# Altium PCB PicoDaisy.PcbDoc
Units mm, origin at the board's own origin, x right, y up, seen from the top; angles counter-clockwise.
Board outline 94.29 x 90.68 mm, 4 copper layers (Top Layer, Layer 1, Layer 2, Bottom Layer), stack 0.603 mm thick; 134 components, 71 nets, 387 pads, 102 vias.
Unrouted connection lines stored in the file: 47.
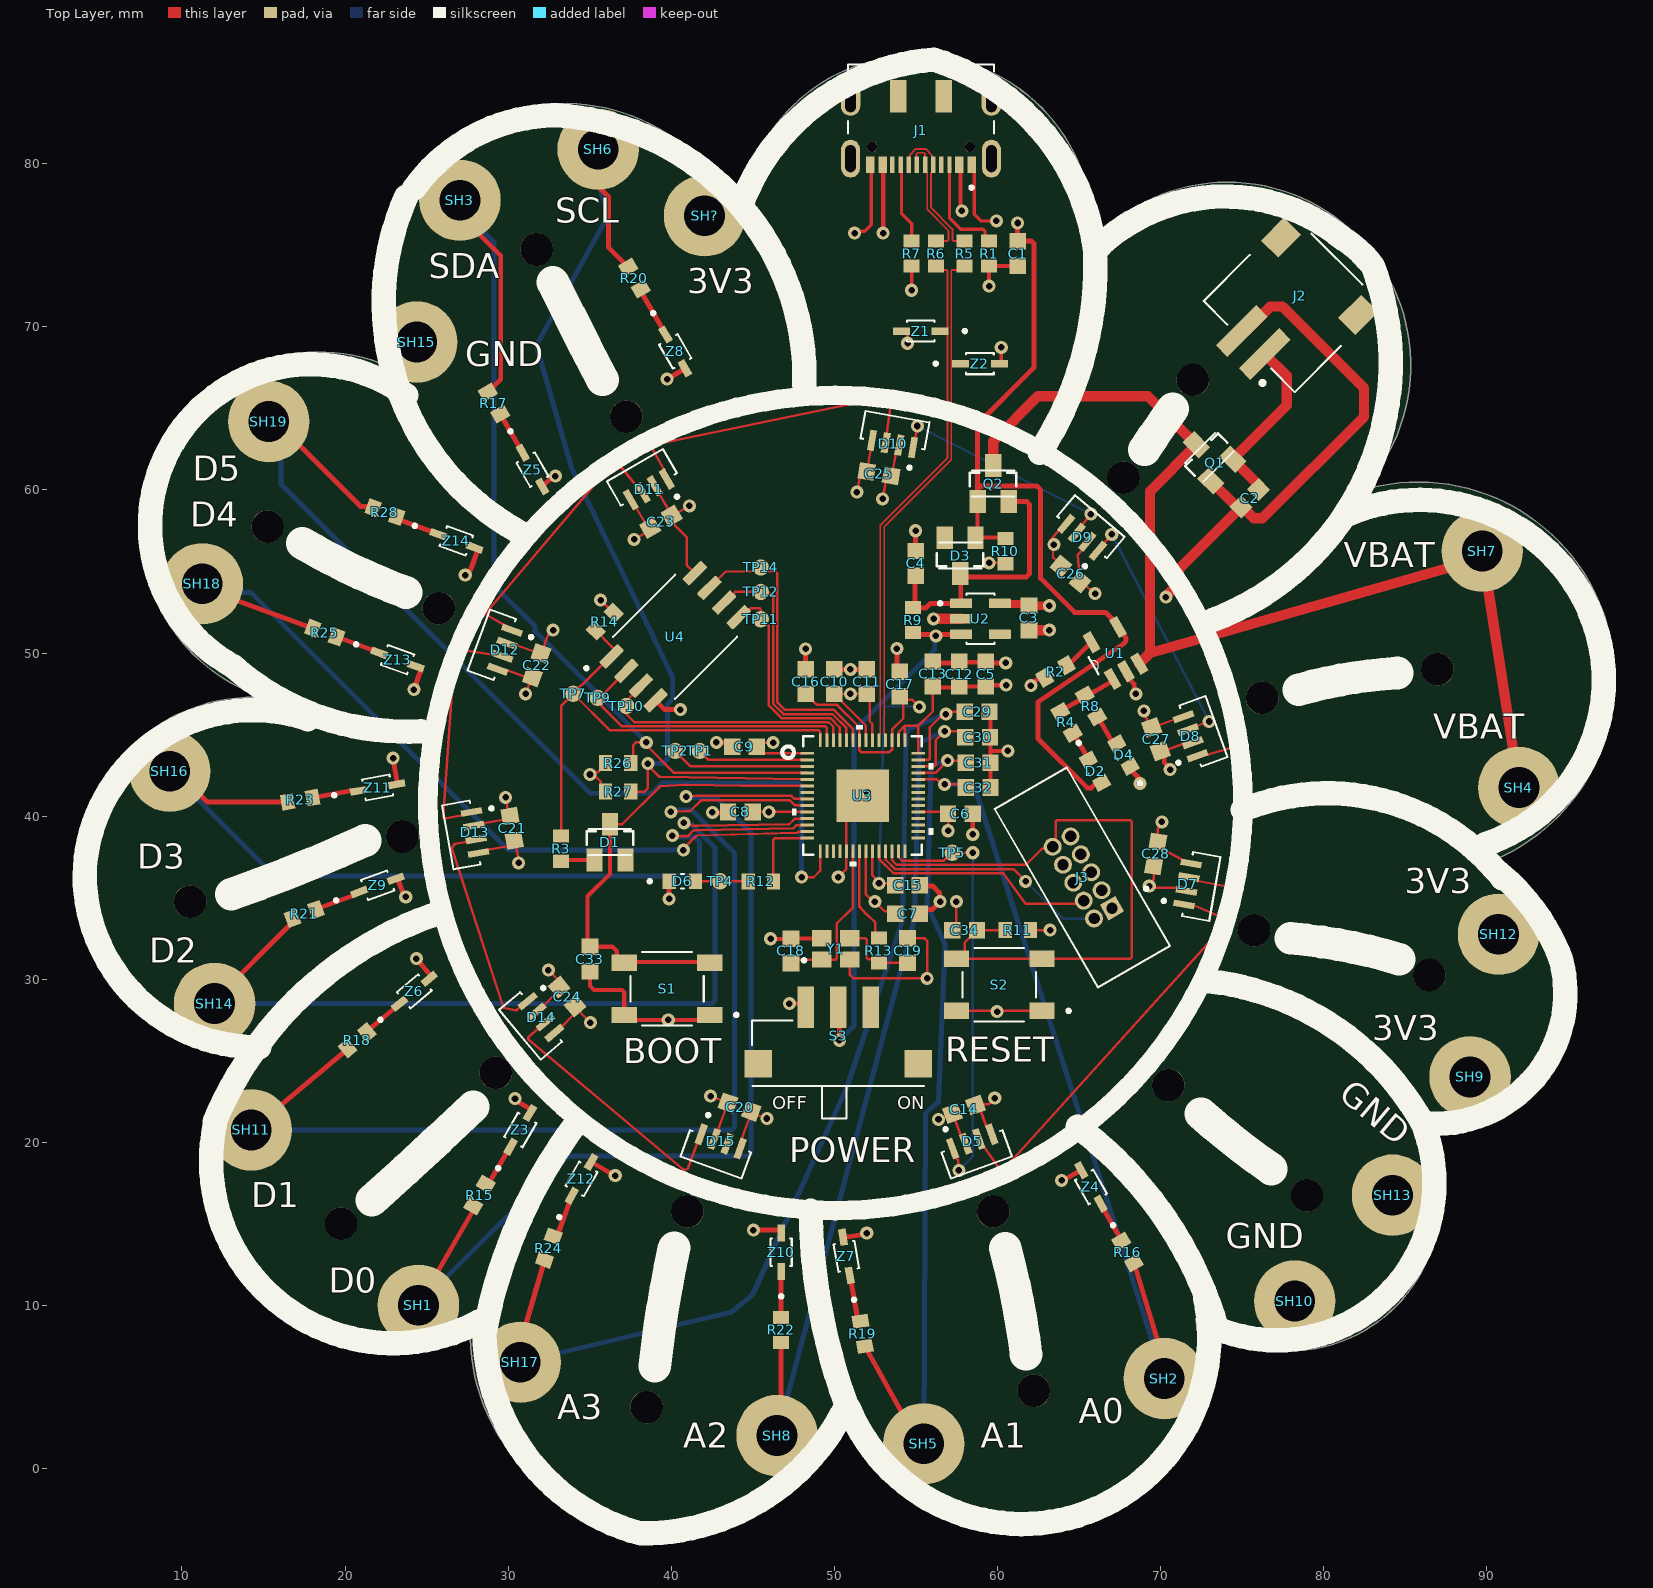
[diagram p0: Top Layer view]
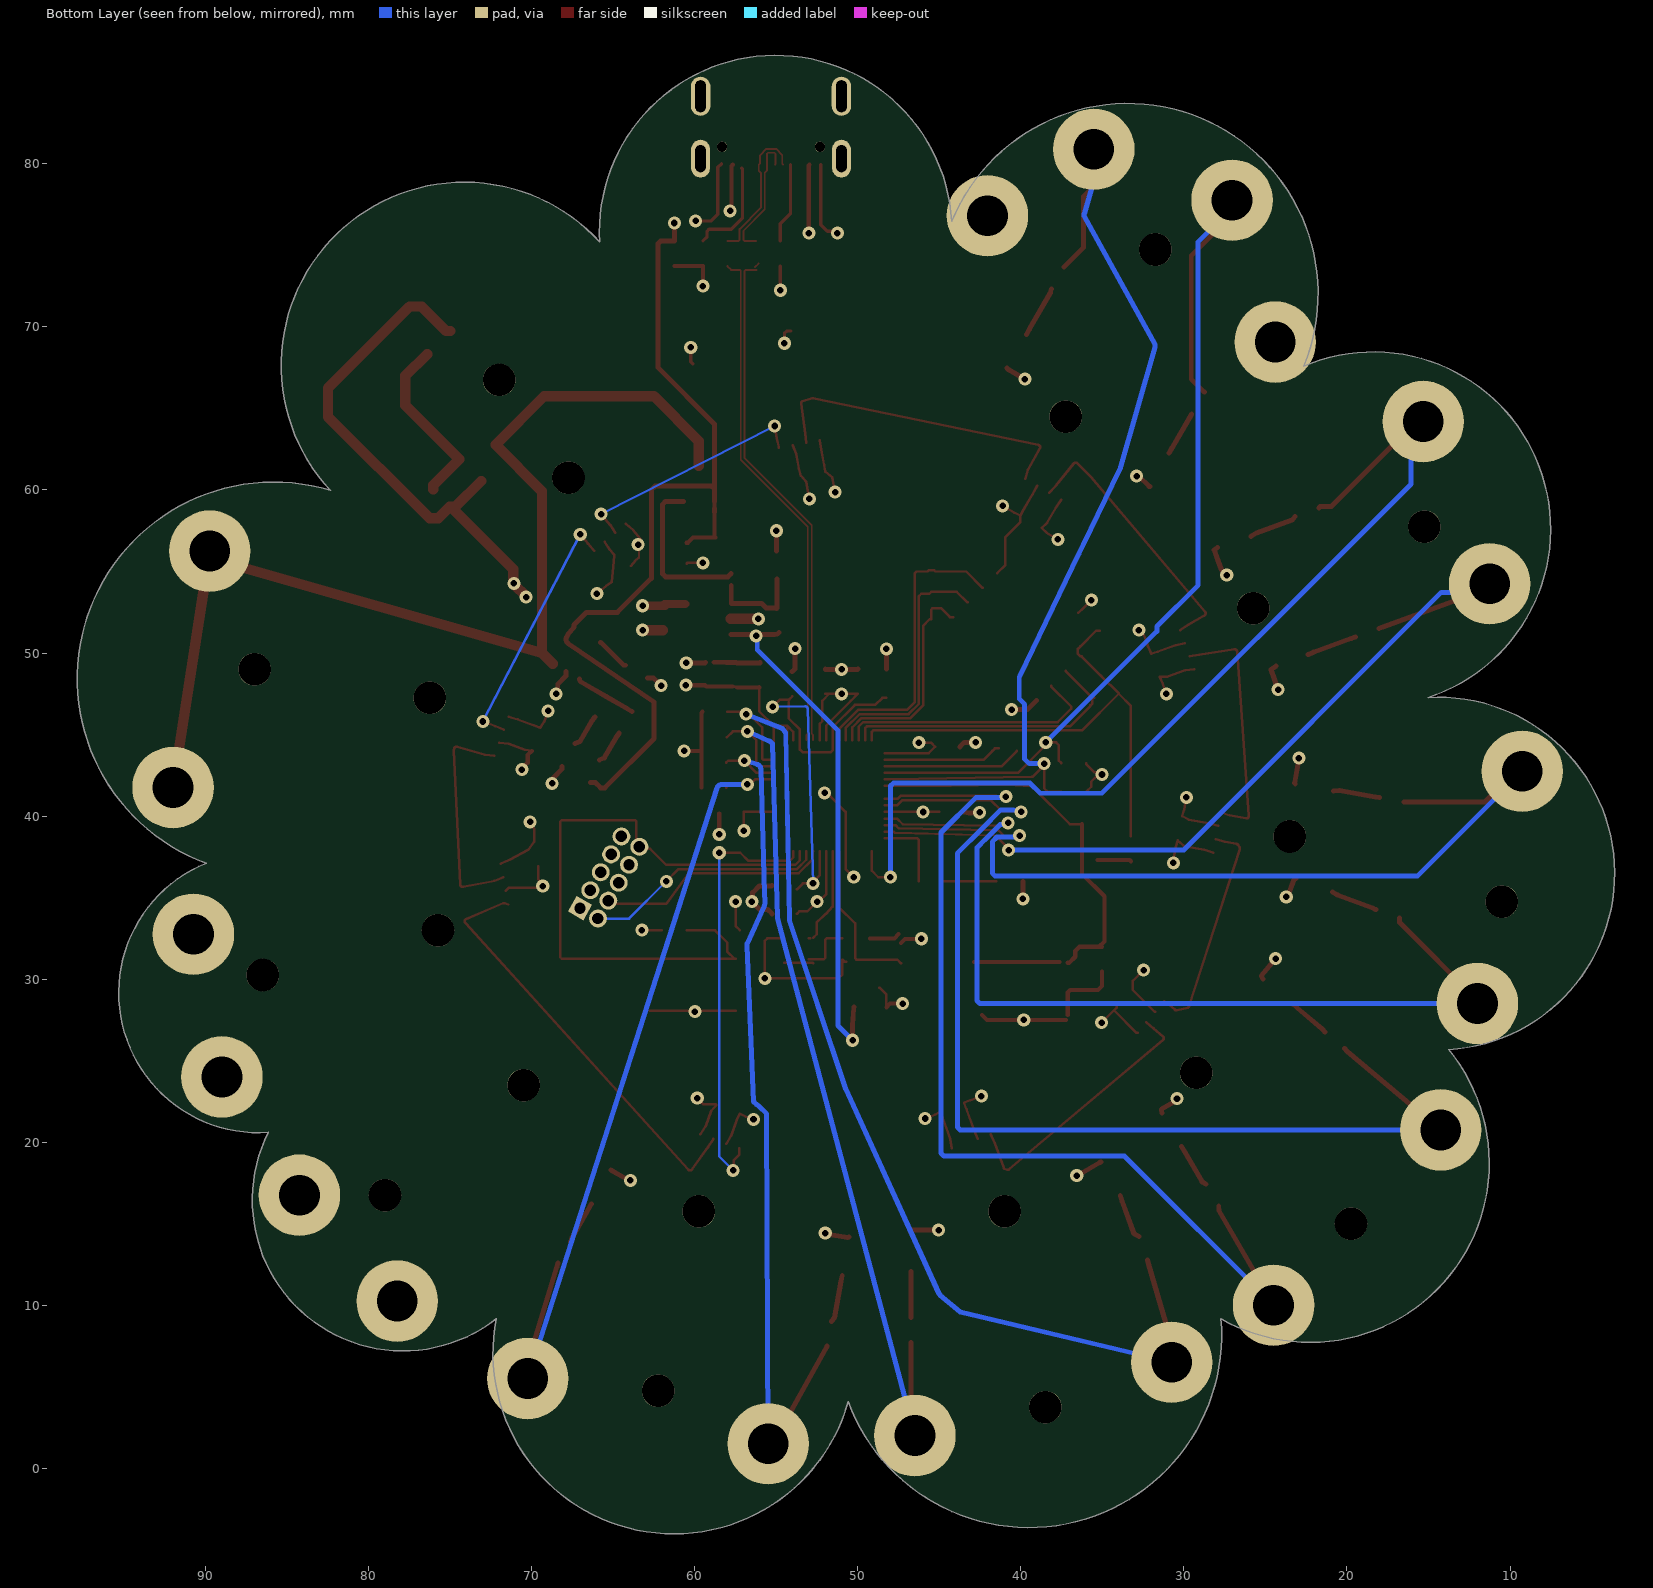
[diagram p1: Bottom Layer view, seen from below]
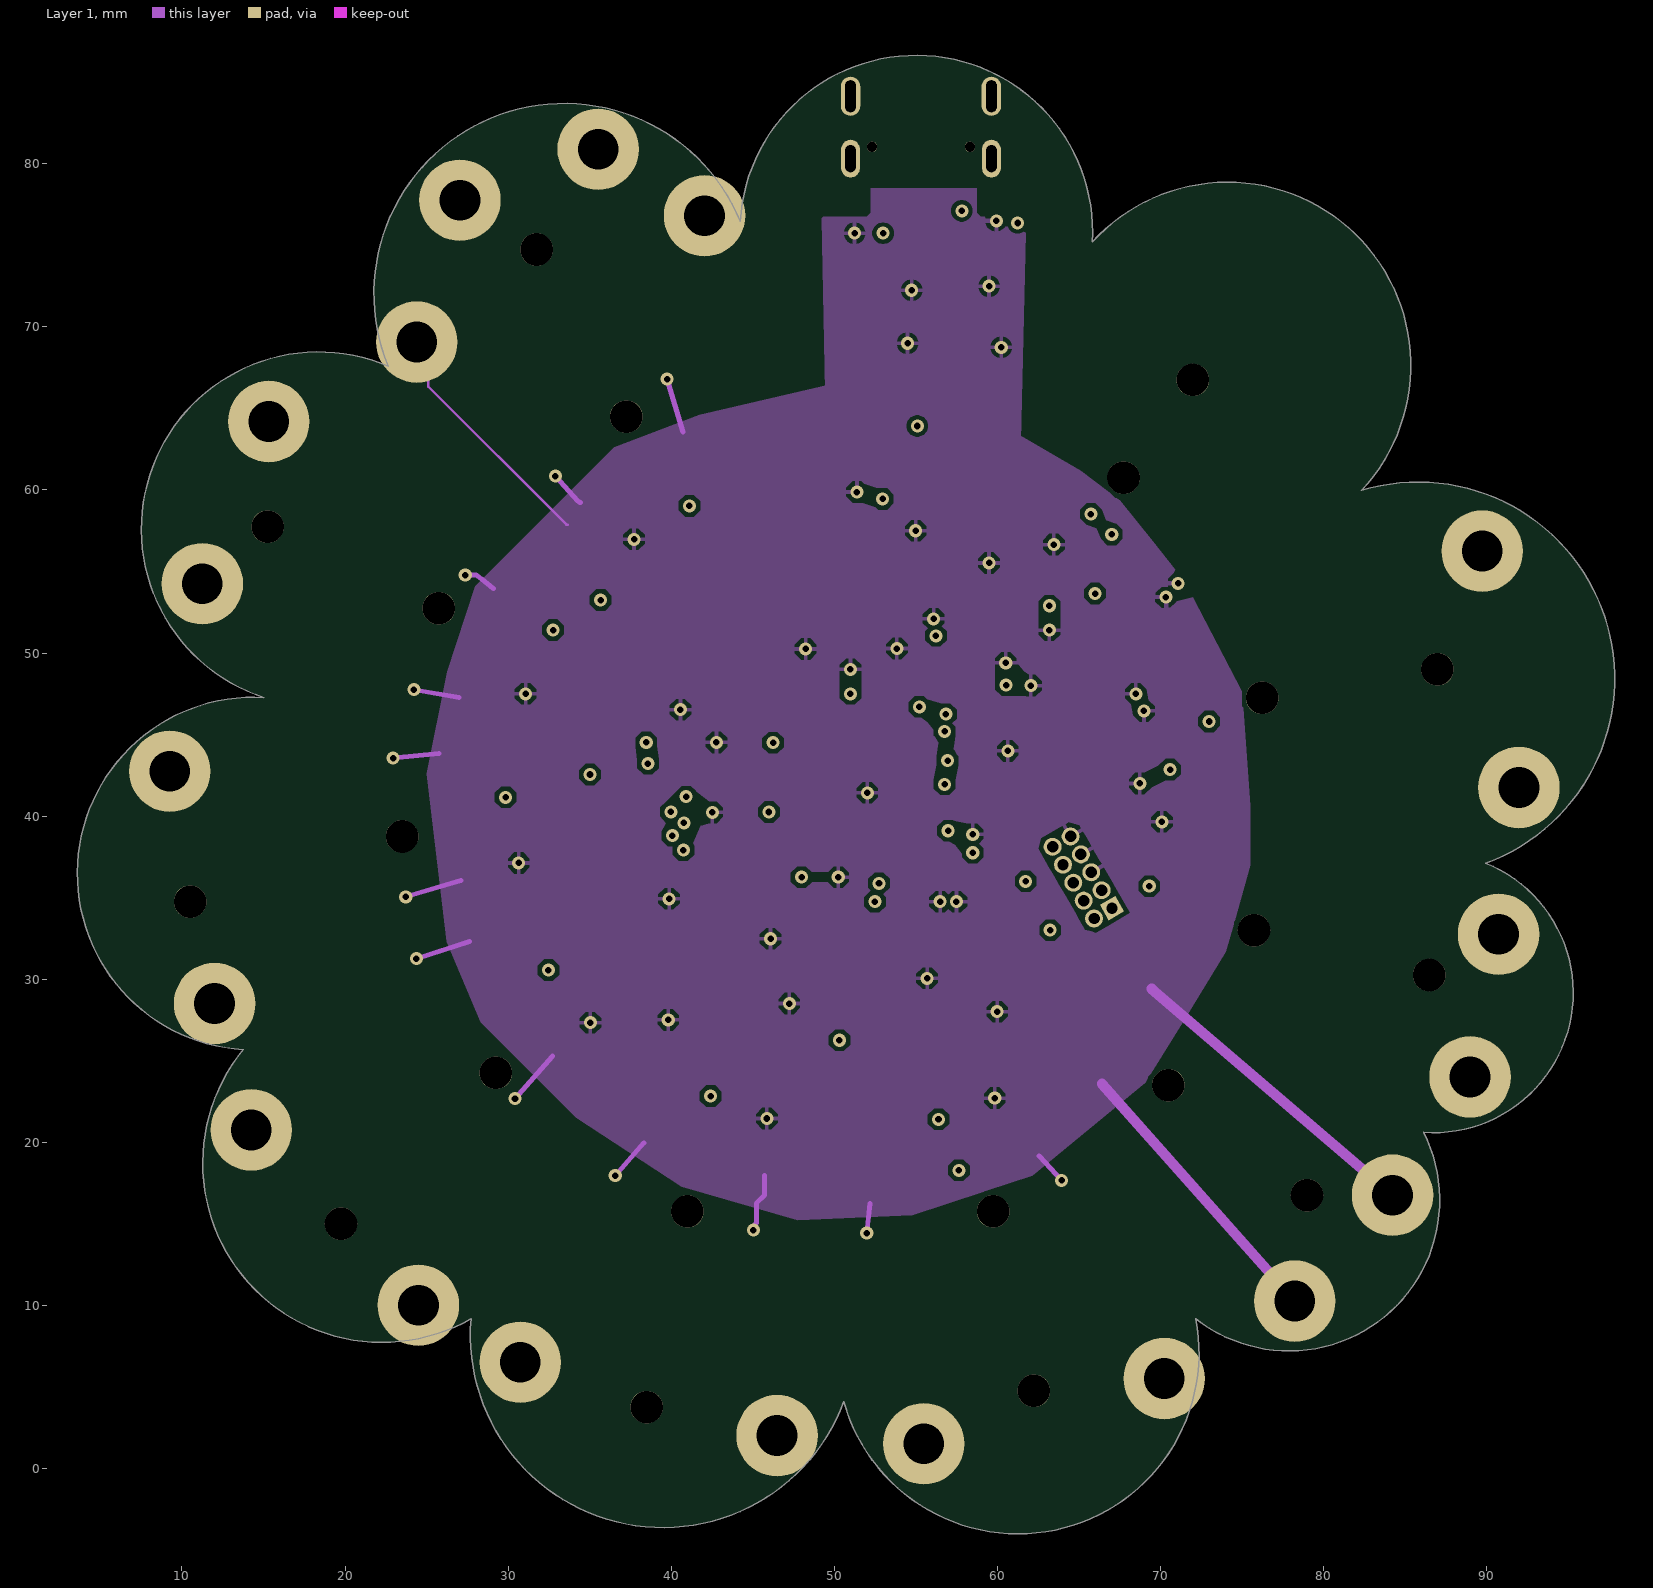
[diagram p2: Layer 1]
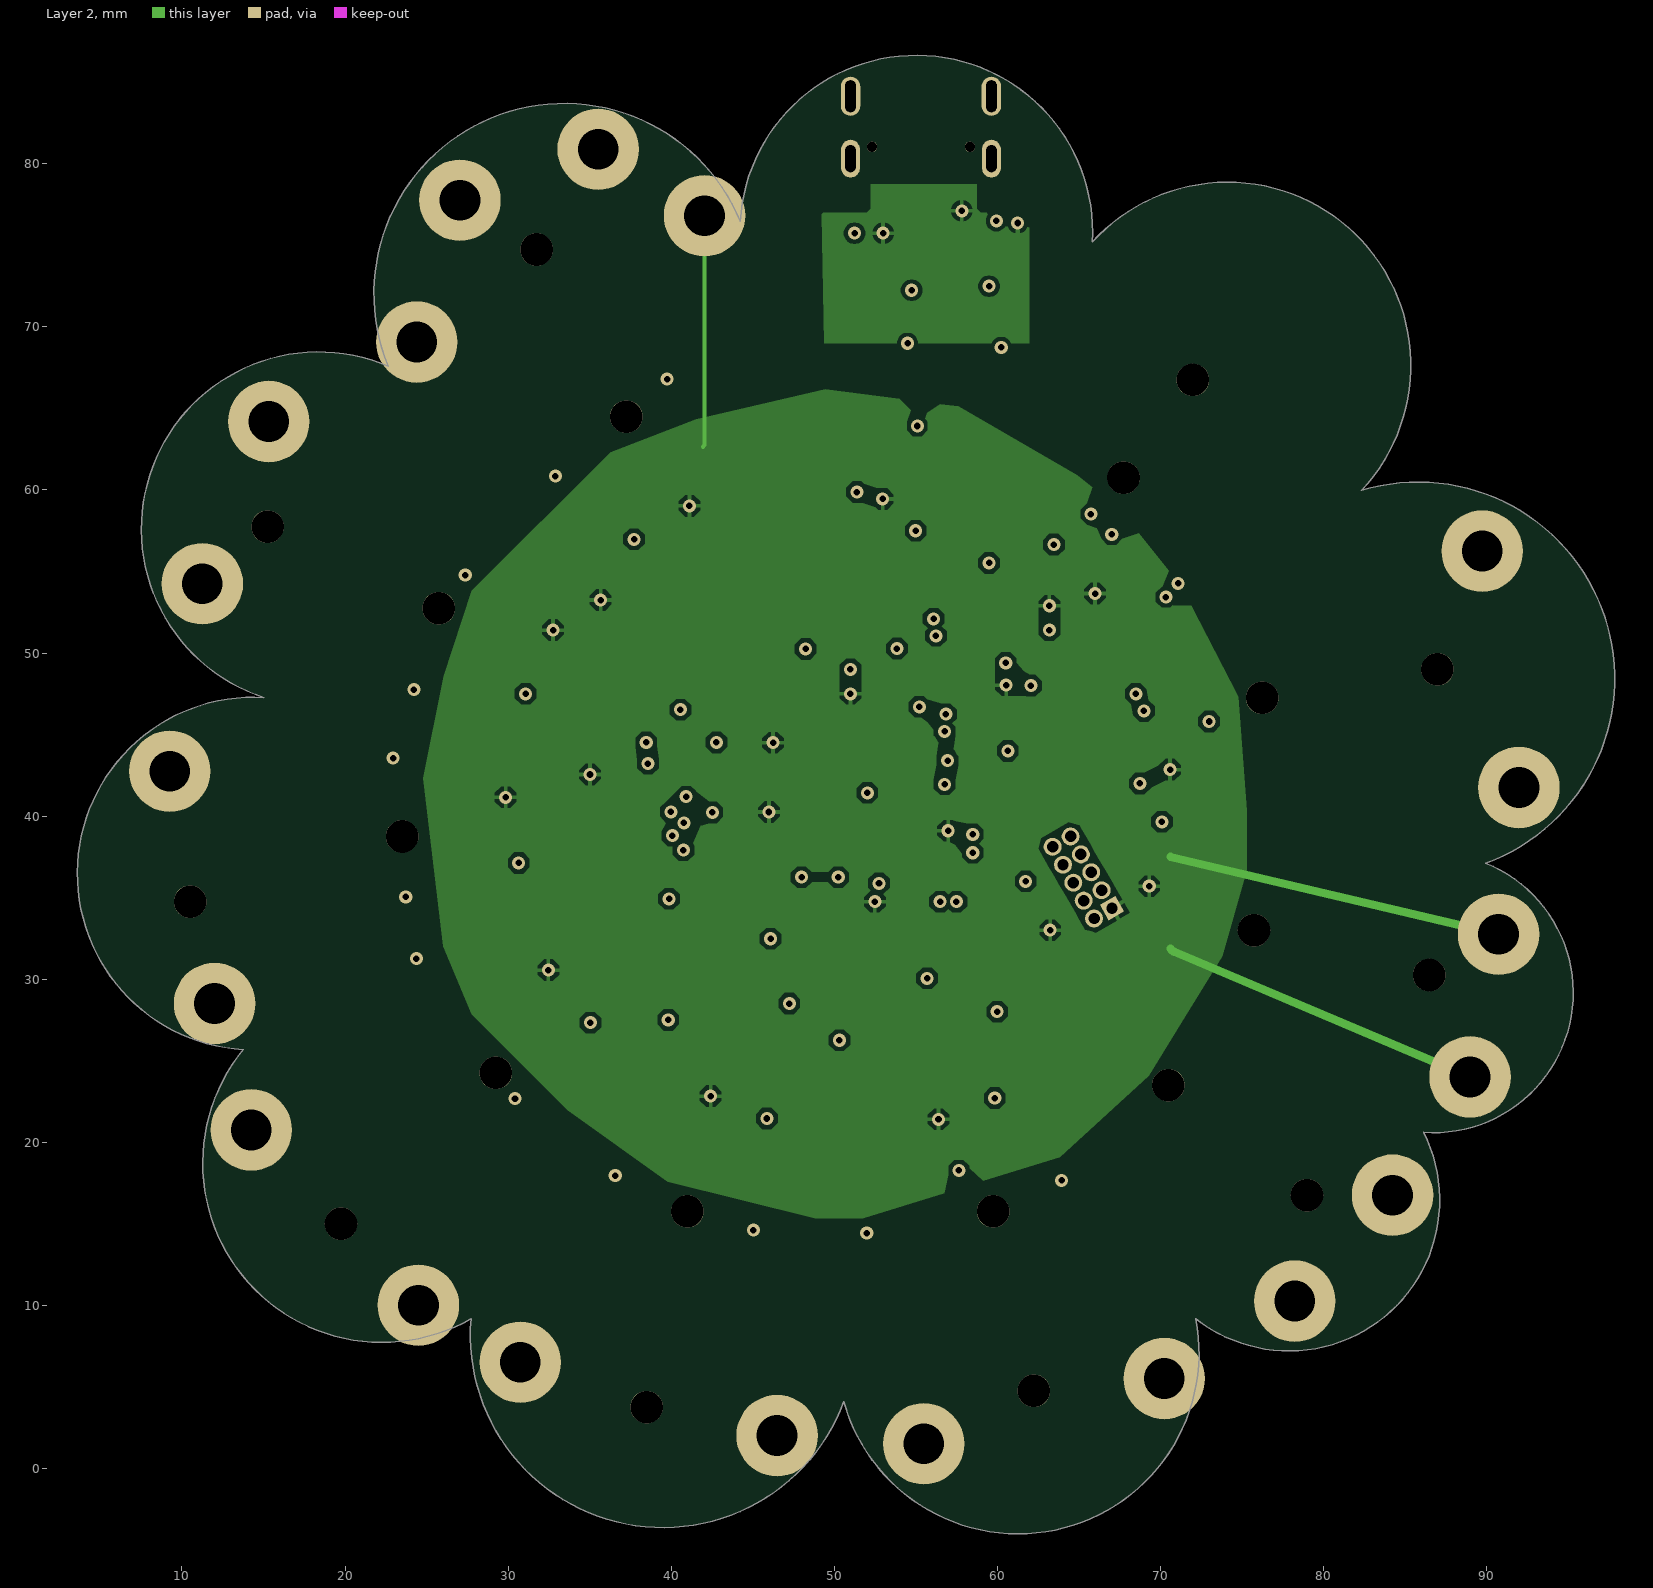
[diagram p3: Layer 2]
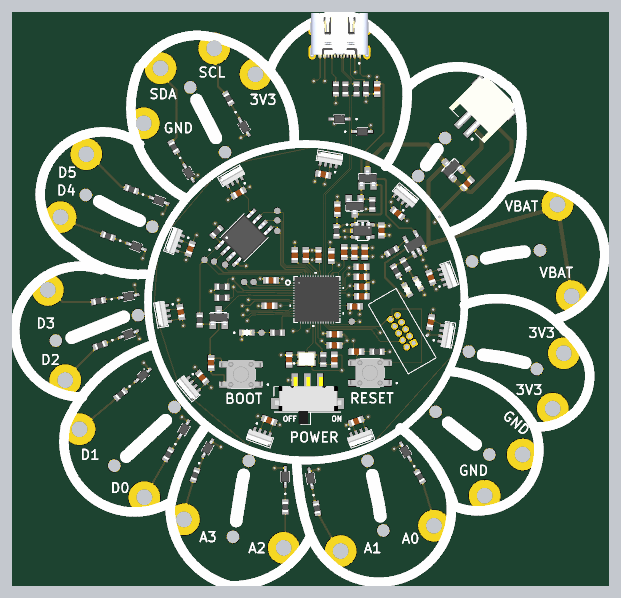
[diagram p4: 3D render of the assembled board from above, using the file's embedded part models]

## Layer stack, top to bottom
Top Solder: solder mask 0.0102, Solder Resist, Dk 3.5
Top Layer: signal copper 0.0356
Dielectric 2: prepreg 0.0711, PP-006, Dk 4.1
Layer 1: signal copper 0.035
Dielectric 1: dielectric 0.32, FR-4, Dk 4.8
Layer 2: signal copper 0.035
Dielectric 3: prepreg 0.0711, PP-006, Dk 4.1
Bottom Layer: signal copper 0.0356
Bottom Solder: solder mask 0.0102, Solder Resist, Dk 3.5

## Board outline
13.76,25.68 ccw(c22.271,18.716) 27.73,9.17 ccw(c39.503,8.175) 50.59,4.09 ccw(c61.281,7.074) 72.18,9.17 ccw(c77.895,16.437) 86.15,20.6 ccw(c86.752,29.156) 89.96,37.11 ccw(c85.822,48.431) 82.34,59.97 ccw(c74.134,67.643) 65.83,75.21 ccw(c55.035,75.845) 44.24,76.48 ccw(c33.445,72.035) 22.65,67.59 ccw(c18.372,57.605) 15.03,47.27 ccw(c14.395,36.475)

## Design rules (kind name [scope] priority, off if disabled: settings)
BoardOutlineClearance [All] p1: gap=0.127 ignorepadtopadclearanceinfootprint=FALSE except(0: Arc-SplitContinuation Track-SplitContinuation SMDPad-SplitContinuation THPad-SplitContinuation Via-SplitContinuation Fill-SplitContinuation Poly-SplitContinuation Region-SplitContinuation Text-SplitContinuation)
Clearance [All] p1: gap=0.254 ignorepadtopadclearanceinfootprint=TRUE except(0: Arc-Hole Track-Hole SMDPad-Hole THPad-Hole Via-Hole Fill-Hole Poly-Hole Region-Hole Text-Hole; 0.1: Arc-Arc Arc-Track Arc-SMDPad Arc-THPad Track-Track Track-SMDPad Track-THPad SMDPad-SMDPad THPad-THPad; 1.1: SMDPad-THPad)
DiffPairsRouting [All] p1: maxlimit=0.127 minlimit=0.127 mostfreqgap=0.127 toplayer_minwidth=0.11 toplayer_maxwidth=0.11 toplayer_prefwidth=0.11 midlayer1_minwidth=0.057 midlayer1_maxwidth=0.057 midlayer1_prefwidth=0.057 midlayer2_minwidth=0.057 midlayer2_maxwidth=0.057 midlayer2_prefwidth=0.057 bottomlayer_minwidth=0.11 bottomlayer_maxwidth=0.11 bottomlayer_prefwidth=0.11 impedanceprofiledriven=TRUE impedanceprofileid={5FEABA5C-CAD9-40B3-98E5-959EDA7281D2} impedanceprofilevalue=90.000000 maxuncoupledlength=12.7
PolygonConnect [All] p1: connectstyle=Relief reliefconductorwidth=0.254 reliefentries=4 polygonreliefangle="90 Angle" airgapwidth=0.254
RoutingVias [All] p1: holewidth=0.711 width=1.27 viastyle="Through Hole" minholewidth=0.711 minwidth=1.27 maxholewidth=0.711 maxwidth=1.27
SolderMaskExpansion [All] p1: expansion=0.102 istentingtop=FALSE
UnpouredPolygon [All] p1: allowunpoured=TRUE
Width [All] p1: maxlimit=2 minlimit=0.1 preferedwidth=0.254
28 further rules are at their usual default settings.

## Classes and differential pairs
differential pair USB*: +USB*_P -USB*_N
differential pair USB: +USB_P -USB_N

## Components (designator, comment, footprint, x,y, rotation, side; value= is the part's Value field where it differs from the comment)
C1 "GRM188R61E106KA73J" CAPC1608X100N 61.25,74.5 r90 top
C2 "GRM188R61E106KA73J" CAPC1608X100N 75.5,59.5 r45 top
C3 "GRM188R61E106KA73J" CAPC1608X100N 61.95,52.15 r90 top
C4 "GRM188R61E106KA73J" CAPC1608X100N 55,55.5 r270 top
C5 "GRM188R61E106KA73J" CAPC1608X100N 59.3,48.7 r270 top
C6 "GRM188R61E106KA73J" CAPC1608X100N 57.741,40.15 r180 top
C7 "GRM188R61E106KA73J" CAPC1608X100N 54.5,34 r180 top
C8 "GRM188R61E106KA73J" CAPC1608X100N 44.25,40.25 r0 top
C9 "GRM188R61E106KA73J" CAPC1608X100N 44.5,44.25 r0 top
C10 "GRM188R61E106KA73J" CAPC1608X100N 50,48.25 r270 top
C11 "GRM188R61E106KA73J" CAPC1608X100N 52,48.25 r270 top
C12 "GRM188R61E106KA73J" CAPC1608X100N 57.675,48.7 r270 top
C13 "GRM188R61E106KA73J" CAPC1608X100N 56.05,48.725 r270 top
C14 "C0603X104K5RAC7867" CAPC1608X100N 57.963,22.01 r200 top
C15 "GRM188R61E106KA73J" CAPC1608X100N 54.5,35.75 r180 top
C16 "GRM188R61E106KA73J" CAPC1608X100N 48.25,48.25 r270 top
C17 "GRM188R61E106KA73J" CAPC1608X100N 54.025,48.1 r270 top
C18 "GRM188R61E106KA73J" CAPC1608X100N 47.35,31.725 r270 top value=12pF
C19 "GRM188R61E106KA73J" CAPC1608X100N 54.5,31.75 r270 top value=12pF
C20 "C0603X104K5RAC7867" CAPC1608X100N 44.2,22.15 r160 top
C21 "C0603X104K5RAC7867" CAPC1608X100N 30.25,39.25 r100 top
C22 "C0603X104K5RAC7867" CAPC1608X100N 31.75,49.25 r70 top
C23 "C0603X104K5RAC7867" CAPC1608X100N 39.375,58.05 r30 top
C24 "C0603X104K5RAC7867" CAPC1608X100N 33.625,28.925 r130 top
C25 "C0603X104K5RAC7867" CAPC1608X100N 52.75,61 r350 top
C26 "C0603X104K5RAC7867" CAPC1608X100N 64.5,54.85 r320 top
C27 "C0603X104K5RAC7867" CAPC1608X100N 69.74,44.713 r290 top
C28 "C0603X104K5RAC7867" CAPC1608X100N 69.725,37.675 r260 top
C29 "GRM188R61E106KA73J" CAPC1608X100N 58.775,46.4 r180 top
C30 "GRM188R61E106KA73J" CAPC1608X100N 58.8,44.825 r180 top
C31 "GRM188R61E106KA73J" CAPC1608X100N 58.834,43.275 r180 top
C32 "GRM188R61E106KA73J" CAPC1608X100N 58.834,41.75 r180 top
C33 "GRM188R61E106KA73J" CAPC1608X100N 35.025,31.225 r90 top
C34 "GRM188R61E106KA73J" CAPC1608X100N 58,33 r0 top
D1 "BAT54" SOT23 36.25,38.4 r0 top
D2 "Red" LEDC1608X35N 66,42.75 r300 top
D3 "BAT54" SOT23 57.725,55.975 r180 top
D4 "Green" LEDC1608X35N 67.75,43.75 r120 top
D5 "WS2812B-4020" LED_WS2812B-4020 58.75,19.25 r200 top
D6 "Blue" LEDC1608X35N 40.69,36 r0 top
D7 "WS2812B-4020" LED_WS2812B-4020 72.513,35.684 r260 top
D8 "WS2812B-4020" LED_WS2812B-4020 72.653,45.19 r290 top
D9 "WS2812B-4020" LED_WS2812B-4020 65.75,57.75 r320 top
D10 "WS2812B-4020" LED_WS2812B-4020 53.729,63.661 r350 top
D11 "WS2812B-4020" LED_WS2812B-4020 38.207,60.774 r30 top
D12 "WS2812B-4020" LED_WS2812B-4020 29,50.5 r70 top
D13 "WS2812B-4020" LED_WS2812B-4020 27.134,38.847 r100 top
D14 "WS2812B-4020" LED_WS2812B-4020 31.372,27.128 r130 top
D15 "WS2812B-4020" LED_WS2812B-4020 42.75,19.25 r160 top
J1 "DX07S016JA1R1500" JAE_DX07S016JA1R1500 55.325,81.05 r180 top locked
J2 "S2B-PH-SM4-TB(LF)(SN)" JST_S2B-PH-SM4-TB(LF)(SN) 75.707,69.043 r135 top
J3 "3221-10-0100-00" CNC_3221-10-0100-00 65.22,36.233 r120 top
Q1 "IRLML6401TRPBF" SOT23 73,62 r45 top
Q2 "IRLML6401TRPBF" SOT23 59.75,60.395 r0 top
R1 "MCT0603HC1001FP100" RESC1508X55N 59.5,74.5 r270 top
R2 "MCT0603HC1001FP100" RESC1508X55N 63.582,48.864 r210 top
R3 "MCT0603HC1001FP100" RESC1508X55N 33.25,38 r90 top value=10k
R4 "MCT0603HC1001FP100" RESC1508X55N 64.25,45.75 r120 top
R5 "MCT0603HC1001FP100" RESC1508X55N 58,74.5 r270 top
R6 "MCT0603HC1001FP100" RESC1508X55N 56.25,74.5 r270 top
R7 "MCT0603HC1001FP100" RESC1508X55N 54.75,74.5 r270 top
R8 "MCT0603HC1001FP100" RESC1508X55N 65.75,46.75 r120 top
R9 "MCT0603HC1001FP100" RESC1508X55N 54.85,52.025 r90 top value=10k
R10 "MCT0603HC1001FP100" RESC1508X55N 60.5,56.25 r90 top value=10k
R11 "" RESC1508X55N 61.271,33 r180 top value=10k
R12 "MCT0603HC1001FP100" RESC1508X55N 45.5,36 r0 top
R13 "MCT0603HC1001FP100" RESC1508X55N 52.75,31.75 r270 top value=1k
R14 "MCT0603HC1001FP100" RESC1508X55N 35.925,51.925 r45 top value=10k
R15 "MCT0603HC1001FP100" RESC1508X55N 28.25,16.75 r60 top
R16 "MCT0603HC1001FP100" RESC1508X55N 68,13.25 r120 top
R17 "MCT0603HC1001FP100" RESC1508X55N 29.135,65.332 r300 top
R18 "MCT0603HC1001FP100" RESC1508X55N 20.75,26.25 r40 top
R19 "MCT0603HC1001FP100" RESC1508X55N 51.75,8.25 r100 top
R20 "MCT0603HC1001FP100" RESC1508X55N 37.75,73 r300 top
R21 "MCT0603HC1001FP100" RESC1508X55N 17.5,34 r20 top
R22 "MCT0603HC1001FP100" RESC1508X55N 46.75,8.479 r90 top
R23 "MCT0603HC1001FP100" RESC1508X55N 17.25,41 r10 top
R24 "MCT0603HC1001FP100" RESC1508X55N 32.5,13.5 r70 top
R25 "MCT0603HC1001FP100" RESC1508X55N 18.75,51.25 r340 top
R26 "MCT0603HC1001FP100" RESC1508X55N 36.75,43.25 r180 top
R27 "MCT0603HC1001FP100" RESC1508X55N 36.75,41.5 r180 top
R28 "MCT0603HC1001FP100" RESC1508X55N 22.45,58.639 r340 top
S1 "PTS_647_SM38_SMTR2_LFS" SW_PTS_647_SM38_SMTR2_LFS 39.75,29.4 r180 top
S2 "PTS_647_SM38_SMTR2_LFS" SW_PTS_647_SM38_SMTR2_LFS 60.125,29.65 r180 top
S3 "SS312SAH4-R" SW_SS312SAH4-R 50.25,26.75 r90 top
SH1 "SewingHole" SewingHole 24.5,10 r0 top
SH2 "SewingHole" SewingHole 70.25,5.5 r0 top
SH3 "SewingHole" SewingHole 27.05,77.775 r0 top
SH4 "SewingHole" SewingHole 92,41.75 r0 top
SH5 "SewingHole" SewingHole 55.5,1.5 r0 top
SH6 "SewingHole" SewingHole 35.525,80.9 r0 top
SH7 "SewingHole" SewingHole 89.75,56.25 r0 top
SH8 "SewingHole" SewingHole 46.5,2 r0 top
SH9 "SewingHole" SewingHole 89,24 r0 top
SH10 "SewingHole" SewingHole 78.25,10.25 r0 top
SH11 "SewingHole" SewingHole 14.25,20.75 r0 top
SH12 "SewingHole" SewingHole 90.75,32.75 r0 top
SH13 "SewingHole" SewingHole 84.25,16.75 r0 top
SH14 "SewingHole" SewingHole 12,28.5 r0 top
SH15 "SewingHole" SewingHole 24.4,69.075 r0 top
SH16 "SewingHole" SewingHole 9.25,42.75 r0 top
SH17 "SewingHole" SewingHole 30.75,6.5 r0 top
SH18 "SewingHole" SewingHole 11.25,54.25 r0 top
SH19 "SewingHole" SewingHole 15.325,64.2 r0 top
SH? "SewingHole" SewingHole 42.05,76.825 r0 top
TP1 "TestPoint" TP 41.75,44 r90 top
TP2 "TestPoint" TP 40.25,44 r90 top
TP4 "TestPoint" TP 43,36 r90 top
TP5 "TestPoint" TP 57.25,37.75 r90 top
TP7 "TestPoint" TP 34,47.5 r90 top
TP9 "TestPoint" TP 35.5,47.25 r90 top
TP10 "TestPoint" TP 37.25,46.75 r90 top
TP11 "TestPoint" TP 45.5,52.07 r90 top
TP12 "TestPoint" TP 45.5,53.75 r90 top
TP14 "TestPoint" TP 45.5,55.25 r90 top
U1 "MCP73831T-2ACI/OT" SOT95P280X145-5N 67.25,50 r120 top
U2 "AP2112K-3.3TRG1" SOT95P285X140-5N 58.975,52.1 r0 top
U3 "RP2040" IC57_RP2040 51.75,41.25 r0 top
U4 "Flash" SOIC127P790X216-8N 40.25,51 r45 top locked
Y1 "ECS-120-12-36Q-CWY-TR" XTAL_ECS-120-12-36Q-CWY-TR 50.1,31.85 r0 top
Z1 "DESD5V0U1BA-7" SOD2513X120N 55.31,69.75 r180 top
Z2 "DESD5V0U1BA-7" SOD2513X120N 58.94,67.75 r0 top
Z3 "DESD5V0U1BA-7" SOD2513X120N 30.75,20.75 r60 top
Z4 "DESD5V0U1BA-7" SOD2513X120N 65.75,17.25 r120 top
Z5 "DESD5V0U1BA-7" SOD2513X120N 31.5,61.25 r300 top
Z6 "DESD5V0U1BA-7" SOD2513X120N 24.25,29.25 r40 top
Z7 "DESD5V0U1BA-7" SOD2513X120N 50.75,13 r100 top
Z8 "DESD5V0U1BA-7" SOD2513X120N 40.25,68.5 r300 top
Z9 "DESD5V0U1BA-7" SOD2513X120N 22,35.75 r20 top
Z10 "DESD5V0U1BA-7" SOD2513X120N 46.75,13.25 r90 top
Z11 "DESD5V0U1BA-7" SOD2513X120N 22,41.75 r10 top
Z12 "DESD5V0U1BA-7" SOD2513X120N 34.5,17.75 r60 top
Z13 "DESD5V0U1BA-7" SOD2513X120N 23.225,49.6 r340 top
Z14 "DESD5V0U1BA-7" SOD2513X120N 26.825,56.875 r340 top

## Footprints (in the part's own frame and the unit in brackets; to place one, negate y for a bottom-side part, rotate by r counter-clockwise, add the part's x,y. Pads: shape width x height; smd on the part's side, far side on the other; paste and mask are expansions set on the pad)
CAPC1608X100N [mm]
  rect 1x1.02 smd: 1(-0.759,0) 2(0.759,0)
  body extent -0.8,-0.49 0.8,0.51, height 0.4
CNC_3221-10-0100-00 [mm]
  rect 1.1x1.1 hole 0.7: 1(-2.54,-0.635)
  round 1.1 hole 0.7: 2(-2.54,0.635) 3(-1.27,-0.635) 4(-1.27,0.635) 5(0,-0.635) 6(0,0.635) 7(1.27,-0.635) 8(1.27,0.635) 9(2.54,-0.635) 10(2.54,0.635)
  silkscreen extent -6.32,-3.15 6.32,2.55
IC57_RP2040 [mil]
  rect 32x7 smd paste+0 mask+0: 1(-134,102.36) 2(-134,86.61) 3(-134,70.87) 4(-134,55.12) 5(-134,39.37) 6(-134,23.62) 7(-134,7.87) 8(-134,-7.87) 9(-134,-23.62) 10(-134,-39.37) 11(-134,-55.12) 12(-134,-70.87) 13(-134,-86.61) 14(-134,-102.36) 29(134,-102.36) 30(134,-86.61) 31(134,-70.87) 32(134,-55.12) 33(134,-39.37) 34(134,-23.62) 35(134,-7.87) 36(134,7.87) 37(134,23.62) 38(134,39.37) 39(134,55.12) 40(134,70.87) 41(134,86.61) 42(134,102.36)
  rect 7x32 smd paste+0 mask+0: 15(-102.36,-134) 16(-86.61,-134) 17(-70.87,-134) 18(-55.12,-134) 19(-39.37,-134) 20(-23.62,-134) 21(-7.87,-134) 22(7.87,-134) 23(23.62,-134) 24(39.37,-134) 25(55.12,-134) 26(70.87,-134) 27(86.61,-134) 28(102.36,-134) 43(102.36,134) 44(86.61,134) 45(70.87,134) 46(55.12,134) 47(39.37,134) 48(23.62,134) 49(7.87,134) 50(-7.87,134) 51(-23.62,134) 52(-39.37,134) 53(-55.12,134) 54(-70.87,134) 55(-86.61,134) 56(-102.36,134)
  rect 126x126 smd paste-62.5 mask+0: 57(0,0)
  silkscreen extent -194,-170 170,170, body extent -138,-138 138,138, height 35
JAE_DX07S016JA1R1500 [mm]
  rect 0.52x1 smd: 1(-3.1,1.1) 2(-2.35,1.1) 11(2.35,1.1) 12(3.1,1.1)
  rect 0.27x1 smd: 3(-1.75,1.1) 4(-1.25,1.1) 5(-0.75,1.1) 6(-0.25,1.1) 7(0.25,1.1) 8(0.75,1.1) 9(1.25,1.1) 10(1.75,1.1)
  rect 1x2 smd: S1(-1.4,-3.1) S2(1.4,-3.1)
  oval 1.158x2.316 hole 0.65 slot 1.65 at 90 deg: S3(-4.32,0.725) S4(4.32,0.725)
  oval 1.2x2.4 hole 0.65 slot 1.95 at 90 deg: S5(-4.32,-3.1) S6(4.32,-3.1)
  round 0.63 hole 0.63 unplated: ""(-3,0) ""(3,0)
  round 0.6 hole 0.6 unplated: ""(3,0)
  silkscreen extent -4.47,-5.05 4.47,2.6, body extent -4.47,-5.48 4.47,1.42, height 3.31
JST_S2B-PH-SM4-TB(LF)(SN) [mm]
  rect 1x3.5 smd: 1(-1,0) 2(1,0)
  rect 1.5x2 smd: S1(-3.35,-5.75) S2(3.35,-5.75)
  silkscreen extent -3.95,-7.25 3.95,1.45, body extent -3.95,-7.24 3.95,1.36, height 5.63
LED_WS2812B-4020 [mm]
  rect 0.42x1.3 smd: 1(1.275,-0.85) 2(0.425,-0.85) 3(-0.425,-0.85) 4(-1.275,-0.85)
  silkscreen extent -1.99,-2.2 1.99,0.85, body extent -1.87,-0.87 2.13,0.64, height 2.09
LEDC1608X35N [mm]
  rect 0.81x0.93 smd: A(0.81,0) C(-0.81,0)
  silkscreen extent -2.1,-0.45 0.09,0.45, body extent -0.8,-0.4 0.8,0.4, height 0.8
RESC1508X55N [mm]
  rect 0.81x0.98 smd: 1(-0.771,0) 2(0.771,0)
  body extent -0.77,-0.43 0.77,0.43, height 0.55
SewingHole [mm]
  round 5 hole 2.5: 1(0,0)
SOD2513X120N [mm]
  rect 1.04x0.46 smd: 1(-1.19,0) 2(1.19,0)
  silkscreen extent -2.81,-0.65 0.85,0.65, body extent -1.25,-0.65 1.25,0.65, height 1.2
SOIC127P790X216-8N [mm]
  rrect25% 1.61x0.58 smd: 1(-3.605,1.905) 2(-3.605,0.635) 3(-3.605,-0.635) 4(-3.605,-1.905) 5(3.605,-1.905) 6(3.605,-0.635) 7(3.605,0.635) 8(3.605,1.905)
  silkscreen extent -5.31,-2.69 2.69,2.69, body extent -3.95,-2.64 3.95,2.64, height 2.16
SOT23 [mm]
  rect 1x1.4 smd: 1(-0.95,-1.1) 2(0.95,-1.1) 3(0,1.1)
  silkscreen extent -1.42,-0.8 1.42,0.8, body extent -1.46,-1.2 1.46,1.2, height 1.2
SOT95P280X145-5N [mil]
  rect 50x22 smd: 1(-51,37) 2(-51,0) 3(-51,-37) 4(51,-37) 5(51,37)
  silkscreen extent -24,49 24,61, body extent -53,-57 53,57, height 57
SOT95P285X140-5N [mm]
  rrect15% 1.35x0.6 smd: 1(-1.185,0.95) 2(-1.185,0) 3(-1.185,-0.95) 4(1.185,-0.95) 5(1.185,0.95)
  silkscreen extent -2.57,-1.55 0.85,1.55, body extent -1.5,-1.4 1.5,1.4, height 1.4
SW_PTS_647_SM38_SMTR2_LFS [mm]
  rect 1.55x1 smd: 1(-2.625,1.6) 2(2.625,1.6) 3(-2.625,-1.6) 4(2.625,-1.6)
  silkscreen extent -4.35,-2.25 2.25,2.25, body extent -3.5,-2.25 3.5,2.25, height 3.8
SW_SS312SAH4-R [mm]
  rect 2.55x1 smd: 1(1.525,-2) 2(1.525,0) 3(1.525,2)
  rect 1.7x1.7 smd: P$1(-1.95,-4.9) P$2(-1.95,4.9)
  silkscreen extent -5.3,-5.25 0.7,5.3, body extent -5.14,-5.37 2.25,5.12, height 3.05
TP [mm]
  round 1 smd: 1(0,0)
XTAL_ECS-120-12-36Q-CWY-TR [mm]
  rect 1.2x1 smd: 1(-0.85,-0.65) 2(0.85,-0.65) 3(0.85,0.65) 4(-0.85,0.65)
  silkscreen extent -2.05,-0.8 -1.85,-0.6, body extent -1.25,-1 1.25,1, height 0.6

## Part data
C1 C2 C3 C4 C5 C6 C7 C8 C9 C10 C11 C12 C13 C15 C16 C17 C18 C19 C29 C30 C31 C32 C33 C34: "SMD Capacitor X5R(EIA) with Capacitance: 10uF Tol. 10%. Rated Voltage: 25Vdc", Package=None, Availability=Unavailable, MP=GRM188R61E106KA73J, Price=None
C14 C20 C21 C22 C23 C24 C25 C26 C27 C28: library part GRM188R61E106KA73J, "CAP CER 0.1UF 50V X7R 0603", Package=None, Availability=Unavailable, MP=C0603X104K5RAC7867, Price=None
D1 D3: "Diode Schottky 30V 200mA Surface Mount SOT-23-3 _TO-236_", Package="SOT-23-3 ON Semiconductor", Availability=Unavailable, MF="ON Semiconductor", MP=BAT54, Price=None, SnapEDA_Link=https://www.snapeda.com/parts/BAT54/ON%20Semiconductor/view-part/1356687/?ref=snap
D2 D4 D6: library part LTST-C190KRKT, "Red 631nm LED Indication - Discrete 2V 0603 (1608 Metric)", Package="0603 Lite-On", Check_prices=https://www.snapeda.com/parts/LTST-C190KRKT/Lite-On+Inc./view-part/?ref=eda, MF="Lite-On Inc.", MP=LTST-C190KRKT, SnapEDA_Link=https://www.snapeda.com/parts/LTST-C190KRKT/Lite-On+Inc./view-part/?ref=snap
D5 D7 D8 D9 D10 D11 D12 D13 D14 D15: "12mA RGB SMD,2x4mm Light Emitting Diodes", Package=Package, Availability="Not in stock", Check_prices=https://www.snapeda.com/parts/WS2812B-4020/Worldsemi/view-part/?ref=eda, MF=Worldsemi, MP=WS2812B-4020, Price=None, SnapEDA_Link=https://www.snapeda.com/parts/WS2812B-4020/Worldsemi/view-part/?ref=snap
J1: "USB-C (USB TYPE-C) USB 2.0 Receptacle Connector 24 (16+8 Dummy) Position Surface Mount, Right Angle; Through Hole", Package=None, Availability=Unavailable, MP=DX07S016JA1R1500, Price=None
J2: "Connector Header Surface Mount, Right Angle 2 position 0.079 (2.00mm)", Package=None, Check_prices=https://www.snapeda.com/parts/S2B-PH-SM4-TB(LF)(SN)/JST+Sales+America+Inc./view-part/?ref=eda, Digi-Key_Part_Number=455-1749-2-ND, MF="JST Sales", MP=S2B-PH-SM4-TB(LF)(SN), Purchase-URL=https://pricing.snapeda.com/search/part/S2B-PH-SM4-TB(LF)(SN)/?ref=eda, SnapEDA_Link=https://www.snapeda.com/parts/S2B-PH-SM4-TB(LF)(SN)/JST+Sales+America+Inc./view-part/?ref=snap
J3: "Connector Header Through Hole 10 position 0.050 _1.27mm_", Package=None, Digi-Key_Part_Number=1175-1733-ND, Digi-Key_Purchase_URL=https://www.digikey.com/product-detail/en/cnc-tech/3221-10-0100-00/1175-1733-ND/4878932?utm_source=snapeda&utm_medium=aggregator&utm_campaign=symbol, MF="CNC Tech", MP=3221-10-0100-00, SnapEDA_Link=https://www.snapeda.com/parts/3221-10-0100-00/CNC%20Tech/view-part/596947/?ref=snap
Q1 Q2: library part BSS84, "P-Channel 12 V 4.3A (Ta) 1.3W (Ta) Surface Mount Micro3™/SOT-23", Availability=Good, MF=Infineon, MP=IRLML6401TRPBF, Price=None
R1 R3 R4 R5 R6 R7 R8 R9 R10 R12 R13 R14 R15 R16 R17 R18 R19 R20 R21 R22 R23 R24 R25 R26 R27 R28: Package=None, Availability=Unavailable, MP=MCT0603HC1001FP100, Price=None
R2: "RES 1K OHM 1% 1/10W 0603", Package=None, Availability=Unavailable, MP=MCT0603HC1001FP100, Price=None
R11: library part MCT0603HC1001FP100, Package=None, Availability=Unavailable, MP=MCT0603HC1001FP100, Price=None
S1 S2: "Tactile Switch SPST-NO Top Actuated Surface Mount", Package=None, Check_prices=https://www.snapeda.com/parts/PTS%20647%20SM38%20SMTR2%20LFS/C%2526K/view-part/?ref=eda, Digi-Key_Part_Number=PTS647SM38SMTR2LFSTR-ND, MF=C&K, MP="PTS 647 SM38 SMTR2 LFS", Purchase-URL="https://pricing.snapeda.com/search/part/PTS 647 SM38 SMTR2 LFS/?ref=eda", SnapEDA_Link=https://www.snapeda.com/parts/PTS%20647%20SM38%20SMTR2%20LFS/C%2526K/view-part/?ref=snap
S3: "æ»‘åŠ¨å¼€å…³SPDTè¡¨é¢è´´è£…ï¼Œç›´è§’", Package=None, Availability=Unavailable, MF="NKK Switches", MP=SS312SAH4-R, Price=None, SnapEDA_Link=https://www.snapeda.com/parts/SS312SAH4-R/NKK%20Switches/view-part/231456/?ref=snap
U1: "Charger IC Lithium Ion/Polymer SOT-23-5", Package="SOT-23 Microchip", Availability="In Stock", Check_prices=https://www.snapeda.com/parts/MCP73831T-2ACI/OT/Microchip/view-part/?ref=eda, MF=Microchip, MP=MCP73831T-2ACI/OT, Price=None, Purchase-URL=https://pricing.snapeda.com/search/part/MCP73831T-2ACI/OT/?ref=eda, SnapEDA_Link=https://www.snapeda.com/parts/MCP73831T-2ACI/OT/Microchip/view-part/?ref=snap
U2: "Linear Voltage Regulator IC Positive Fixed 1 Output 600mA SOT-25", Package="SOT-753 Diodes Inc.", Availability="In Stock", Check_prices=https://www.snapeda.com/parts/AP2112K-3.3TRG1/Diodes+Inc./view-part/?ref=eda, MF="Diodes Inc.", MP=AP2112K-3.3TRG1, Price=None, Purchase-URL=https://pricing.snapeda.com/search/part/AP2112K-3.3TRG1/?ref=eda, SnapEDA_Link=https://www.snapeda.com/parts/AP2112K-3.3TRG1/Diodes+Inc./view-part/?ref=snap
U3: "No Description Available", Mfr_Name="Raspberry Pi", RefDes=RefDes, Type=Type
U4: library part W25Q64JVSSIQ, "FLASH - NOR Memory IC 64Mbit SPI - Quad I/O 133 MHz 8-SOIC", MPN=W25Q64JVSSIQ
Y1: "12MHz Â±10ppm Crystal 12pF 150 Ohms 4-SMD, No Lead", Package="SMD-4 ECS International", Digi-Key_Part_Number=XC2419CT-ND, MF="ECS Inc.", MP=ECS-120-12-36Q-CWY-TR, SnapEDA_Link=https://www.snapeda.com/parts/ECS-120-12-36Q-CWY-TR/ECS%20Inc./view-part/2122498/?ref=snap
Z1 Z2 Z3 Z4 Z5 Z6 Z7 Z8 Z9 Z10 Z11 Z12 Z13 Z14: MFN=DESD5V0U1BA-7

## Free pads (board coordinates)
  round 2 hole 2: 2(10.5,34.75) 2(15.25,57.75) 2(19.75,15) 2(23.5,38.75) 2(25.75,52.75) 2(29.25,24.25) 2(31.75,74.75) 2(37.25,64.5) 2(38.5,3.75) 2(41,15.75) 2(59.75,15.75) 2(62.25,4.75) 2(67.75,60.75) 2(70.5,23.5) 2(72,66.75) 2(75.75,33) 2(76.25,47.25) 2(79,16.75) 2(86.5,30.25) 2(87,49)

## Via types
v1: diameter 0.8, hole 0.4, Top Layer to Bottom Layer, tented both sides, 102 vias

## Nets (pads, with @x,y where several pads share a name; then routed paths per layer and width w, separated by ;. In a path a pad name is that pad's centre, name@x,y a point inside that pad or via, vN(x,y) a via of type N, cw(c..) or ccw(c..) an arc to the next point about the centre after c; other vN are vias at no path point)
1V1: C15.2 C16.2 C17.2 U3.23 U3.45 U3.50 | length 28.5
  Top Layer w0.152: C16.2@48.25,47.252 48.499,47.252 48.936,46.815 50.185,46.815 51.55,45.45 U3.50 51.55,44.025 51.675,43.9 53.375,43.9 53.55,44.075 U3.45 53.55,45.3 54.25,46 C17.2@54.25,46.982 ; U3.23 52.35,36.364 52.75,35.964 v1(52.75,35.875) 53.366,35.875 C15.2@53.741,35.5 ; C17.2 54.222,47.144 54.781,47.144 v1(55.225,46.7)
  Bottom Layer w0.152: v1(52.75,35.875) 53.071,46.576 cw(c53.223,46.571) 53.225,46.723 ; 53.225,46.723 v1(55.225,46.7)
3V3: C3.2 C5.2 C6.2 C7.2 C8.2 C9.2 C10.2 C11.2 C12.2 C13.2 C14.2 C20.2 C21.2 C22.2 C23.2 C24.2 C25.2 C26.2 C27.2 C28.2 D5.2 D7.2 D8.2 D9.2 D10.2 D11.2 D12.2 D13.2 D14.2 D15.2 J3.1 R11.1 R14.2 R26.2 R27.2 SH9.1 SH12.1 SH?.1 U2.5 U3.1 U3.10 U3.22 U3.33 U3.42 U3.43 U3.44 U3.48 U3.49 U4.8 | length 138
  Top Layer w0.152: D13.2 28.454,39.559 29.716,39.782 C21.2 29.982,40.404 v1(29.85,41.15) ; D12.2 30.511,50.487 31.595,50.093 C22.2 32.178,50.353 32.348,50.82 32.45,51.1 32.474,51.124 v1(32.758,51.408) ; D14.2 31.804,28 33.137,29.333 C24.2 33.137,29.888 v1(32.475,30.55) ; v1(35.675,53.25) 36.17,52.755 R14.2 ; R27.2 35.683,41.796 35.683,42.117 35.374,42.426 35.149,42.426 v1(35.025,42.55) 35.149,42.674 35.488,42.674 35.979,43.165 R26.2 ; D11.2 39.283,59.751 39.826,58.811 C23.2 ; v1(41.125,59.025) 40.415,58.615 C23.2 ; U4.8 40.95,55.398 40.95,57.116 40.048,58.018 40.032,58.018 C23.2 ; v1(42.425,22.825) 43.098,22.58 C20.2 43.332,22.004 42.864,20.719 D15.2 ; C8.2 v1(46,40.25) U3.10 ; v1(46.25,44.5) 45.509,44.5 C9.2 45.659,43.85 U3.1 ; C10.2 50.009,47.5 v1(51,47.5) C11.2@51.751,47.5 ; C10.2@50.01,47.491 50.434,47.067 50.434,47.057 51.95,45.541 U3.49 ; U3.22 51.95,35.197 52.397,34.75 v1(52.5,34.75) 53.102,34.148 53.593,34.148 C7.2 ; C11.2 C11.2@52.01,47.491 ; C11.2@52.001,47.5 C11.2@51.751,47.5 ; U3.48 52.35,45.65 52.184,45.816 52.184,47.067 C11.2@51.751,47.5 ; v1(52.975,59.45) 53.158,60.488 C25.2 53.61,61.289 53.772,62.208 D10.2 ; U3.44 53.963,44.666 53.963,45.167 54.321,45.525 ; U3.43 54.337,44.666 54.337,45.054 54.321,45.07 54.321,45.525 ; U3.33 C6.2@56.991,40.25 ; U3.42 55.154,45.525 ; C13.2@56.05,47.884 56.05,46.421 55.154,45.525 ; C13.2@56.05,47.934 C13.2 ; v1(56.4,21.4) 56.865,21.569 C14.2 57.427,21.353 57.775,20.396 D5.2 ; v1(56.991,39.1) C6.2@56.991,40.159 ; C12.2@57.475,47.925 C12.2@57.675,47.925 ; R11.1 v1(63.25,33) ; D9.2 65.215,56.341 64.987,56.069 64.952,56.027 64.952,55.965 65.033,54.963 C26.2 65.435,54.124 v1(66,53.65) ; C28.2 69.593,36.118 69.325,35.85 v1(69.325,35.7) 69.43,35.595 71.421,35.595 D7.2 ; C27.2 70.435,44.073 71.415,44.429 D8.2 ; 54.321,45.525 55.154,45.525
  Top Layer w0.254: C13.2@56.05,47.884 C12.2@57.4,47.884 ; C12.2 C5.2 59.384,48.025 v1(60.55,48.025) ; C27.2 70.249,43.751 70.249,43.272 70.6,42.921 v1(70.6,42.85)
  Top Layer w0.508: U2.5@60.581,53.004 61.855,53.004 C3.2 ; C3.2@61.813,52.9 v1(63.2,52.9)
  Layer 2 w0.254: 41.95,62.65 42.05,62.75 SH?.1
  Layer 2 w0.508: 70.625,31.875 ccw(c71.056,32.144) 70.857,31.677 SH9.1 ; 70.625,37.5 SH12.1
\QSPI_CS: R3.2 R14.1 TP7.1 U3.56 U4.1 | length 31.3
  Top Layer w0.152: R3.2 33.25,46.75 TP7.1 36.25,45.25 49.054,45.25 49.143,45.161 49.143,44.66 U3.56 ; TP7.1@33.99,47.51 35.076,48.597 36.277,49.798 U4.1 36.506,49.95 36.506,50.253 36.354,50.405 R14.1 R14.1@35.16,51.38
\RESET: C34.2 J3.10 R11.2 S2.3 S2.4 U3.26 | length 40.4
  Top Layer w0.152: U3.26 53.55,37.289 53.839,37 61.75,37 62.734,37.984 63.27,37.984 63.581,38.296 63.581,39.661 63.671,39.75 68.161,39.75 68.25,39.661 68.25,31.339 68.161,31.25 S2.3 S2.4@57.576,31.25 ; S2.4 S2.4@57.576,31.25 ; R11.2 C34.2 58.759,32.99 58,32.231 58,31.674 S2.4@57.576,31.25
A0: C32.2 R16.1 SH2.1 U3.38 | length 50.5
  Top Layer w0.152: U3.38 56.3,42.25 56.6,41.95 v1(56.775,41.95) 57.875,41.95 C32.2
  Top Layer w0.305: R16.1 68.461,12.334 70.407,5.916 70.407,5.794 70.371,5.727 SH2.1
  Bottom Layer w0.305: v1(56.775,41.95) 58.356,41.928 cw(c58.352,41.623) 58.641,41.718 58.642,41.716 SH2.1
A1: C31.2 R19.1 SH5.1 U3.39 | length 53.6
  Top Layer w0.152: U3.39 56.205,42.65 v1(56.955,43.4) ; v1@56.9,43.4 v1(56.955,43.4) ; C31.2 57.95,43.4 v1(56.955,43.4)
  Top Layer w0.305: R19.1 52.016,7.258 52.017,7.253 55.138,1.664 55.168,1.634 55.224,1.578 55.301,1.556 SH5.1
  Bottom Layer w0.305: SH5.1 55.594,21.734 56.066,22.206 56.229,22.325 56.402,22.498 56.812,32.034 56.812,32.044 ccw(c56.507,32.044) 56.792,32.153 ccw(c56.506,32.046) 56.785,32.17 ; 56.784,32.171 56.483,32.836 55.766,34.416 cw(c56.5,34.75) 55.694,34.763 cw(c56.5,34.75) 55.697,34.819 55.729,35.211 ccw(c55.021,35.269) 55.731,35.248 55.953,42.892 cw(c56.258,42.882) 56.173,43.175 v1(56.955,43.4)
A2: C30.2 R22.1 SH8.1 U3.40 | length 55.9
  Top Layer w0.152: U3.40 56.136,43.05 56.225,43.139 56.225,44.651 v1(56.773,45.199) ; v1@56.775,45.225 56.801,45.199 57.667,45.199 C30.2
  Top Layer w0.305: SH8.1 46.75,2.25 R22.1
  Bottom Layer w0.305: SH8.1 54.928,33.73 54.937,33.764 55.248,44.448 55.334,44.534 55.373,44.574 55.425,44.597 v1(56.773,45.199)
A3: C29.2 R24.1 SH17.1 U3.41 | length 65.8
  Top Layer w0.152: U3.41 55.786,43.45 55.875,43.539 55.875,45.45 56.825,46.4 C29.2
  Top Layer w0.305: SH17.1 30.593,6.786 30.555,6.854 30.555,6.976 32.166,12.532 R24.1
  Bottom Layer w0.305: SH17.1 43.723,9.589 44.965,10.635 44.975,10.644 45.024,10.692 50.754,23.265 50.761,23.28 54.202,33.615 54.203,33.662 54.421,45.096 54.616,45.375 v1(56.85,46.25)
D0: R15.1 SH1.1 U3.8 | length 63.3
  Top Layer w0.152: v1(40.925,41.189) 41.504,41.233 47.374,41.233 47.557,41.05 U3.8
  Top Layer w0.305: SH1.1 27.849,15.8 R15.1
  Bottom Layer w0.305: SH1.1 33.65,19.15 44.721,19.15 44.9,19.329 44.9,38.99 42.76,41.13 40.983,41.13 v1(40.925,41.189)
D1: R18.1 SH11.1 U3.9 | length 68.1
  Top Layer w0.152: v1(39.988,40.262) 40.747,40.305 cw(c40.788,39.576) 40.803,40.306 41.174,40.299 41.855,40.98 47.27,40.98 47.6,40.65 U3.9
  Top Layer w0.305: SH11.1 19.988,25.565 R18.1
  Bottom Layer w0.305: SH11.1 43.721,20.75 43.9,20.929 43.9,37.72 42.41,39.21 42.4,39.21 41.227,40.382 40.454,40.382 40.429,40.356 40.083,40.356 v1(39.988,40.262)
D2: R21.1 SH14.1 U3.11 | length 57.6
  Top Layer w0.152: v1(40.788,39.576) 41.367,39.407 41.493,39.407 41.619,39.407 47.246,39.496 47.6,39.85 U3.11
  Top Layer w0.305: SH14.1 12,28.705 16.775,33.48 R21.1
  Bottom Layer w0.305: SH14.1 42.518,28.5 42.696,28.679 42.696,38.064 42.185,38.575 42.175,38.575 41.269,39.481 40.883,39.481 v1(40.788,39.576)
D3: R23.1 SH16.1 U3.12 | length 55.4
  Top Layer w0.152: v1@40.25,38.75 41,38.75 41.36,39.11 41.517,39.133 41.592,39.133 47.493,39.243 47.7,39.45 U3.12
  Top Layer w0.305: SH16.1 9.664,42.75 11.548,40.866 R23.1
  Bottom Layer w0.305: SH16.1 15.684,36.316 41.575,36.316 41.753,36.495 41.753,38.424 41.466,38.711 40.164,38.711 v1(40.075,38.8)
D4: R25.1 SH18.1 U3.13 | length 51.7
  Top Layer w0.152: v1(40.75,37.905) 40.75,38 41.558,38.808 47.741,38.991 47.8,39.05 U3.13
  Top Layer w0.305: SH18.1 11.348,54.039 11.371,53.99 11.409,53.952 11.457,53.904 17.788,51.6 R25.1
  Bottom Layer w0.305: SH18.1 11.782,53.718 14.207,53.718 29.996,37.929 40.726,37.929 v1(40.75,37.905)
D5: R28.1 SH19.1 U3.15 | length 61
  Top Layer w0.152: v1(48,36.25) 48.75,36.25 49.15,36.65 U3.15
  Top Layer w0.305: SH19.1 15.75,64.2 20.962,58.988 21.641,58.988 R28.1
  Bottom Layer w0.305: SH19.1 16.075,63.45 16.075,60.36 35.035,41.4 38.815,41.4 39.437,42.021 47.821,42.021 48,41.843 v1(48,36.25)
D6: U3.16
GND: C1.1 C2.1 C3.1 C4.1 C5.1 C6.1 C7.1 C8.1 C9.1 C10.1 C11.1 C12.1 C13.1 C14.1 C15.1 C16.1 C17.1 C18.1 C19.1 C20.1 C21.1 C22.1 C23.1 C24.1 C25.1 C26.1 C27.1 C28.1 C29.1 C30.1 C31.1 C32.1 C33.1 C34.1 D4.C D5.4 D6.C D7.4 D8.4 D9.4 D10.4 D11.4 D12.4 D13.4 D14.4 D15.4 J1.1 J1.12 J2.2 J3.5 J3.7 J3.9 Q1.1 R1.2 R2.2 R7.2 R10.1 S1.1 S1.2 S2.1 S2.2 S3.3 SH10.1 SH13.1 SH15.1 U1.2 U2.2 U3.19 U3.57 U4.4 Y1.2 Y1.4 Z1.2 Z2.2 Z3.2 Z4.2 Z5.2 Z6.2 Z7.2 Z8.2 Z9.2 Z10.2 Z11.2 Z12.2 Z13.2 Z14.2 | length 259.6
  Top Layer w0.152: D13.4 28.742,37.93 30.003,38.153 C21.1 30.506,38.094 30.65,37.275 v1(30.65,37.123) ; D12.4 29.93,48.943 31.031,48.542 C22.1 31.312,48.151 v1(31.075,47.5) ; D14.4 32.897,26.698 C24.1@34.287,28.088 ; C24.1 34.113,28.262 C24.1@34.287,28.088 ; v1(35.05,27.325) C24.1@34.287,28.088 ; D11.4 37.854,58.926 38.397,57.986 C23.1 38.404,57.367 v1(37.725,56.975) ; D15.4 44.324,20.192 44.781,21.45 44.79,21.474 C20.1 45.282,21.666 v1(45.875,21.45) ; S3.3 48.25,29.05 S3.3@48.674,29.474 ; v1(50.25,36.25) 50.75,36.75 U3.19 50.75,40.25 U3.57 51.925,41.425 v1(52.031,41.425) ; Y1.2@50.725,31.075 50.825,31.075 Y1.2 50.95,30.275 51.175,30.05 v1(55.7,30.05) 55.7,32.35 55.55,32.5 C19.1@54.509,32.5 ; v1(51.4,59.875) 51.558,60.77 C25.1 52.075,61.56 52.237,62.48 D10.4 ; C34.1 57.5,33.259 v1(57.5,34.75) ; S2.2 S2.1 ; v1(59.5,55.525) 60.454,55.525 R10.1 ; D5.4 59.335,20.978 58.992,21.922 C14.1 58.717,22.31 59.46,22.31 v1(59.85,22.7) ; 63.423,55.86 63.423,56.598 v1(63.475,56.65) 63.475,56.825 63.317,56.984 63.317,56.992 63.78,57.544 D9.4 ; 63.423,55.86 63.646,55.672 C26.1 ; v1(69,46.45) 69.24,45.79 C27.1 69.891,45.568 70.874,45.926 D8.4 ; v1(70.1,39.65) 70.1,39.475 69.857,39.232 C28.1 70.21,37.93 71.356,37.318 D7.4
  Top Layer w0.203: v1(51.25,75.75) 51.364,75.864 51.864,75.864 52.275,76.275 J1.12@52.275,79.95 ; Z1.2 54.372,69.75 54.5,69.622 v1(54.5,69) ; v1(54.75,72.25) R7.2 ; J1.1@58.357,80.018 58.583,79.792 58.583,76.917 59,76.5 v1(59.946,76.5) ; Z2.2 60.25,67.87 v1(60.25,68.75)
  Top Layer w0.254: C33.1 35.025,29.575 35.275,29.325 36.975,29.325 37.125,29.175 S1.2 ; S1.2@37.241,27.5 v1(39.825,27.5) 42.075,27.5 S1.1 ; v1(46.1,32.475) 46.108,32.467 47.108,32.467 C18.1@47.35,32.225 ; v1(47.25,28.5) 48.025,28.5 S3.3 ; C18.1@47.5,32.759 47.759,32.5 Y1.4 ; v1(58.5,38.875) C6.1 ; v1(59.5,72.5) R1.2 61.238,73.729 C1.1 ; C29.1 59.593,46.341 59.593,44.05 ; C32.1 C31.1 59.593,44.05 ; v1(60.65,44) 59.643,44 59.593,44.05
  Top Layer w0.305: v1@22.925,43.625 22.939,43.548 23.204,42.041 Z11.2 ; Z9.2 23.245,36.12 v1@23.625,35.075 ; v1(24.225,47.75) 24.662,48.994 Z13.2 ; v1(24.375,31.25) 25.258,30.197 Z6.2 ; v1(27.373,54.773) 27.652,55.052 27.7,55.1 27.904,55.661 28.142,56.313 Z14.2 ; v1@30.375,22.6 30.38,22.597 31.39,22.014 Z3.2 ; Z5.2 32.135,60.219 32.766,60.85 v1(32.9,60.85) ; Z12.2 35.166,18.749 v1@36.55,17.95 ; U4.4 39.048,47.077 39.6,46.525 v1(40.575,46.525) ; v1(39.75,66.8) 40.794,67.403 Z8.2 ; v1(39.875,34.925) 39.877,34.927 39.877,35.998 D6.C ; v1(42.525,40.225) 43.017,40.192 43.17,40.192 C8.1 ; v1(42.78,44.52) 43.471,44.52 C9.1 ; v1(45.05,14.6) 46.672,14.6 46.75,14.522 Z10.2 ; C16.1 v1(48.25,50.25) ; C10.1 50.009,49 v1(51,49) 51.991,49 C11.1 ; Z7.2 50.627,14.142 v1@51.95,14.375 ; v1(53.85,50.275) 53.85,49.034 C17.1 ; C4.1 v1(55,57.5) ; C7.1 55.537,34.278 56.028,34.278 v1(56.5,34.75) 56.449,34.801 56.449,35.301 56.038,35.712 55.297,35.712 C15.1 ; C13.1@56,49.384 C12.1@57.4,49.384 ; C12.1@57.475,49.425 58.066,49.425 58.075,49.434 C5.1@58.834,49.434 ; C5.1@59.334,49.434 59.368,49.4 v1(60.525,49.4) ; v1(62.066,48) 62.545,48.479 R2.2 ; v1@64.075,17.675 65.08,18.255 Z4.2 ; U1.2 67.898,48.602 68.405,48.095 68.405,47.595 v1(68.5,47.5) ; D4.C 68.155,42.871 68.655,42.37 68.655,42.095 v1(68.75,42)
  Top Layer w0.635: v1(56.1,52.1) U2.2 ; C3.1 61.954,51.395 63.195,51.395 v1(63.2,51.4) ; v1(70.35,53.425) 70.35,53.47 71.068,54.188 71.068,54.243 v1(71.1,54.275) 71.132,54.307 71.132,55.132 C2.1 ; Q1.1 74.693,58.963 C2.1 ; J2.2 75.25,69.75 76.75,71.25 77.5,71.25 82.5,66.25 82.5,64.5 76.258,58.258 75.732,58.258 75.027,58.963 C2.1
  Layer 1 w0.152: SH15.1 25.104,68.371 25.104,66.346 33.575,57.875 33.65,57.875
  Layer 1 w0.305: v1(22.95,43.55) 25.775,43.85 ; v1(23.725,35.05) 27.1,36.05 ; v1(24.225,47.75) 27,47.275 ; v1(24.375,31.25) 27.625,32.3 ; v1(27.373,54.773) 27.395,54.795 28.045,54.795 28.379,54.542 29.1,53.95 ; v1(30.425,22.675) 32.725,25.275 ; v1(32.9,60.85) 34.296,59.316 ; 34.297,59.315 ccw(c34.522,59.521) 34.45,59.225 ; v1(36.575,17.95) 38.325,19.95 ; v1(39.75,66.8) 40.725,63.55 ; v1(45.05,14.6) 45.145,14.695 45.145,14.946 45.225,15.026 45.225,16.25 45.725,16.75 45.725,17.95 ; v1(52,14.425) 52.2,16.225 ; 62.575,19.15 v1(63.95,17.65)
  Layer 1 w0.635: 66.425,23.575 SH10.1 ; 69.475,29.4 SH13.1
  Bottom Layer w0.305: SH15.1@23.725,68.65 SH15.1@24.325,68.05
  other v1: 60,28
I2C_SCL: R20.1 R27.1 SH6.1 U3.5 | length 60.5
  Top Layer w0.152: R27.1 38.375,41.5 38.58,41.705 v1@38.58,43.1 ; v1(38.58,43.212) v1@38.58,43.1 ; U3.5 48.016,42.263 39.339,42.402 39.277,42.403 39.234,42.446 39.062,42.618 v1@38.58,43.1
  Top Layer w0.305: SH6.1@35.3,79.75 35.3,78.85 36.15,78 36.15,74.882 R20.1 ; SH6.1@35.757,80.75 SH6.1@36,80.75
  Bottom Layer w0.305: SH6.1@35.3,79.75 36.104,76.957 36.116,76.916 36.116,76.794 31.76,68.916 31.76,68.837 31.76,68.794 31.772,68.753 33.925,61.275 36.175,56.629 36.437,56.088 40.07,48.588 40.1,48.525 40.1,47.19 39.769,46.859 39.769,43.494 39.487,43.212 v1(38.58,43.212)
I2C_SDA: R17.1 R26.1 SH3.1 U3.4 | length 63.5
  Top Layer w0.152: R26.1 37.675,43.404 37.675,44.35 37.845,44.52 v1(38.475,44.52) 38.475,44.35 40.175,42.65 U3.4
  Top Layer w0.305: SH3.1@27.275,77.65 27.275,76.65 29.55,74.375 29.55,66.8 R17.1
  Bottom Layer w0.305: SH3.1@27.275,77.65 27.275,77.075 29.125,75.225 29.125,54.162 31.664,51.623 31.664,51.331 v1(38.475,44.52)
NeoPixels: D5.1 TP5.1 U3.27 | length 26.5
  Top Layer w0.152: U3.27 53.963,37.834 53.963,37.466 54.176,37.252 56.717,37.252 57.215,37.75 TP5.1 v1(58.5,37.75) ; D5.1 57.261,19.251 57.626,18.886 57.626,18.299 v1(57.65,18.275)
  Bottom Layer w0.152: v1(57.65,18.275) 58.5,19.125 v1(58.5,37.75)
NetC4_2: C4.2 D3.3 Q2.2 R9.2 U2.1 | length 15.8
  Top Layer w0.305: C4.2@54.95,54.541 54.95,52.771 54.986,52.735 55.024,52.774 55.633,52.774 55.91,53.05 57.765,53.05 57.765,54.15 ; D3.3@57.775,54.875 57.975,54.675 61.796,54.675 61.975,54.854 61.975,59.121 61.796,59.3 Q2.2@60.706,59.3
NetC19_2: C19.2 R13.2 Y1.3 | length 5
  Top Layer w0.152: Y1.3 51.911,32.5 52,32.411 52,31.297 52.089,31.208 R13.2@53,31.208 ; R13.2 52.762,30.991 C19.2
NetD1_1: D1.1 R3.1 | length 2.1
  Top Layer w0.254: R3.1 33.321,37.3 D1.1
NetD2_C: D2.C R4.1 | length 2.1
  Top Layer w0.305: R4.1 64.787,44.878 65.543,43.569 D2.C@65.845,43.451
NetD4_A: D4.A R8.1 | length 2.1
  Top Layer w0.305: R8.1 66.287,45.878 67.043,44.569 D4.A
NetD5_3: D5.3 D7.1 | length 26
  Top Layer w0.152: D5.3 59.181,19.701 60.165,18.329 ; 60.165,18.328 ccw(c60.289,18.417) 60.337,18.273 ccw(c60.289,18.417) 60.402,18.315 74.067,33.45 74.107,33.493 74.107,33.615 74.041,33.68 71.737,34.665 71.676,34.665 71.649,34.654 D7.1
NetD6_A: D6.A R12.1 TP4.1 | length 3.2
  Top Layer w0.152: D6.A TP4.1 R12.1
NetD7_3: D7.3 D8.1 | length 13.7
  Top Layer w0.152: D7.3 72.292,36.019 74.203,35.657 ; D8.1 72.876,43.772 74.584,44.242 cw(c74.624,44.095) 74.769,44.143 74.791,44.077 cw(c74.646,44.029) 74.799,44.022 74.384,35.8 cw(c74.232,35.807) 74.204,35.657
NetD8_3: D8.3 D9.1 | length 15.6
  Top Layer w0.152: D9.1 66.555,56.714 v1(67.025,57.275) ; D8.3 72.238,45.523 v1(73,45.8)
  Bottom Layer w0.152: v1(67.025,57.275) v1(73,45.8)
NetD9_3: D9.3 D10.1 | length 14.7
  Top Layer w0.152: D10.1 54.966,63.162 v1(55.1,63.925) ; D9.3 65.191,57.859 v1(65.75,58.525)
  Bottom Layer w0.152: v1(55.1,63.925) v1(65.75,58.525)
NetD10_3: D10.3 D11.1 | length 19.8
  Top Layer w0.152: D11.1 39.565,61.239 38.842,62.544 38.823,62.579 38.823,62.618 38.823,62.681 38.868,62.726 38.9,62.758 38.944,62.767 cw(c38.975,62.618) 38.945,62.767 52.747,65.624 52.784,65.624 52.805,65.618 53.405,65.444 53.478,65.372 53.478,65.299 53.476,65.289 53.238,63.467 D10.3
NetD11_3: D11.3 D12.1 | length 16.6
  Top Layer w0.152: D12.1 29.741,51.729 28.745,52.301 cw(c28.821,52.433) 28.705,52.532 35.696,60.795 cw(c35.812,60.697) 35.704,60.804 36.532,61.632 cw(c36.64,61.525) 36.759,61.62 37.861,60.255 D11.3
NetD12_3: D12.3 D13.1 | length 15
  Top Layer w0.152: 26.192,39.859 cw(c26.166,40.009) 26.014,40.019 26.738,50.086 cw(c26.89,50.075) 26.914,50.225 29.068,49.88 D12.3 ; 26.192,39.859 27.205,40.037 D13.1
NetD13_3: D13.3 D14.1 | length 13.6
  Top Layer w0.152: D13.3 27.49,38.418 26.771,38.291 ccw(c26.797,38.141) 26.666,38.219 26.586,38.084 ccw(c26.716,38.006) 26.571,37.96 29.688,28.332 29.699,28.297 29.725,28.271 29.757,28.24 30.436,28.09 30.509,28.09 30.551,28.125 30.753,28.295 D14.1
NetD14_3: D14.3 D15.1 | length 16.5
  Top Layer w0.152: D14.3 31.863,26.973 31.289,26.492 ccw(c31.387,26.375) 31.288,26.259 40.708,18.341 40.751,18.305 40.806,18.305 40.827,18.305 40.997,18.353 41.049,18.405 41.06,18.437 41.614,19.957 D15.1
NetJ1_3: J1.3 R1.1 | length 6.3
  Top Layer w0.203: J1.3@57.125,79.725 57.072,79.672 57.072,76.689 57.761,76 59.131,76 59.25,75.881 59.25,75.521 R1.1
NetJ1_9: J1.9 R7.1 | length 4.9
  Top Layer w0.203: J1.9@54.125,79.95 54.125,76.963 54.75,76.338 R7.1
NetR2_1: R2.1 U1.5 | length 2.1
  Top Layer w0.305: R2.1 64.368,49.25 65.77,50.652 U1.5
NetR4_2: R4.2 R8.2 U1.1 | length 3.8
  Top Layer w0.305: R4.2 64.152,46.595 65.417,47.326 67.026,48.255 U1.1
NetR9_1: R9.1 S3.2 U2.3 | length 33.4
  Top Layer w0.305: S3.2 50.325,27.152 v1(50.325,26.25) ; R9.1 54.953,51.151 v1@56.15,51.151 ; R9.1@55.121,51.15 v1@56.151,51.15 ; v1(56.245,51.056) v1@56.151,51.15 ; U2.3 v1@56.151,51.15
  Bottom Layer w0.305: v1(50.325,26.25) 51.225,27.15 51.225,45.253 56.171,50.199 56.171,50.982 v1(56.245,51.056)
NetR12_2: R12.2 U3.14 | length 4.7
  Top Layer w0.152: R12.2 46.271,38.561 46.36,38.65 U3.14
NetR15_2: R15.2 Z3.1 | length 2.8
  Top Layer w0.305: R15.2 28.886,17.565 29.952,19.412 Z3.1
NetR16_2: R16.2 Z4.1 | length 2.6
  Top Layer w0.305: Z4.1 66.523,15.897 67.527,14.159 R16.2
NetR17_2: R17.2 Z5.1 | length 2.8
  Top Layer w0.305: R17.2 29.652,64.449 30.72,62.598 Z5.1
NetR18_2: R18.2 Z6.1 | length 2.7
  Top Layer w0.305: R18.2 21.507,26.94 23.061,28.244 Z6.1
NetR19_2: R19.2 Z7.1 | length 2.9
  Top Layer w0.305: Z7.1 51.041,11.47 51.435,9.234 R19.2
NetR20_2: R20.2 Z8.1 | length 3.2
  Top Layer w0.305: R20.2 38.197,72.076 39.48,69.854 Z8.1
NetR21_2: R21.2 Z9.1 | length 2.9
  Top Layer w0.305: R21.2 18.452,34.376 20.563,35.144 Z9.1
NetR22_2: R22.2 Z10.1 | length 2.8
  Top Layer w0.305: R22.2 Z10.1
NetR23_2: R23.2 Z11.1 | length 2.9
  Top Layer w0.305: R23.2 18.26,41.169 20.453,41.556 Z11.1
NetR24_2: R24.2 Z12.1 | length 2.8
  Top Layer w0.305: R24.2 33.068,14.383 33.788,16.362 Z12.1
NetR25_2: R25.2 Z13.1 | length 3.1
  Top Layer w0.305: R25.2 19.711,50.898 22.043,50.05 Z13.1@22.382,49.907
NetR28_2: R28.2 Z14.1 | length 3
  Top Layer w0.305: R28.2 23.364,58.156 25.563,57.356 Z14.1@25.882,57.157
QSPI_SCK: TP12.1 U3.52 U4.6 | length 15.8
  Top Layer w0.152: U4.6 43.284,53.1 43.934,53.75 44.771,53.75 TP12.1 45.613,53.637 46.113,53.637 46.252,53.498 46.252,47.391 46.252,46.891 46.883,46.26 49.883,46.26 50.75,45.393 U3.52
QSPI_SDO0: TP11.1 U3.53 U4.5 | length 13.4
  Top Layer w0.152: U4.5 44.356,52.202 44.903,52.75 45.411,52.75 45.5,52.661 TP11.1 45.596,52.07 46,51.666 46,47.286 46,46.786 46.779,46.007 49.779,46.007 50.337,45.449 50.337,44.666 U3.53
QSPI_SDO1: TP9.1 U3.55 U4.2 | length 18.1
  Top Layer w0.152: TP9.1 35.602,47.25 U4.2 ; TP9.1@35.614,47.262 35.614,46.907 35.738,46.783 35.738,46.762 36.998,45.502 49.446,45.502 49.55,45.399 U3.55
QSPI_SDO2: TP10.1 U3.54 U4.3 | length 16.3
  Top Layer w0.152: U4.3 38.15,47.956 36.91,46.716 36.91,46.59 37.745,45.755 49.674,45.755 49.943,45.486 49.943,44.66 U3.54
QSPI_SDO3: TP14.1 U3.51 U4.7 | length 18.6
  Top Layer w0.152: U4.7 43.352,55 45.25,55 45.338,55.088 45.642,55.088 45.729,55 46.411,55 46.505,54.906 46.505,46.995 46.988,46.512 49.988,46.512 51.15,45.35 U3.51
SWCLK: J3.4 U3.24 | length 14.4
  Top Layer w0.152: U3.24 52.763,37.834 52.763,37.363 53.633,36.493 60.371,36.493 60.416,36.448 60.425,36.439 61.701,34.668 61.754,34.615 65.104,34.615 J3.4
SWDIO: J3.2 U3.25 | length 14.8
  Top Layer w0.152: U3.25 53.163,37.834 53.163,37.32 53.692,36.79 53.737,36.745 61.005,36.745 v1(61.75,36)
  Bottom Layer w0.152: v1(61.75,36) 64.034,33.716 J3.2
UART_RX: TP2.1 U3.3 | length 8.5
  Top Layer w0.152: TP2.1 41.2,43.05 U3.3
UART_TX: TP1.1 U3.2 | length 7.3
  Top Layer w0.152: TP1.1@41.371,44.15 41.6,44.15 TP1.1 42.3,43.45 U3.2
USB*_N: J1.5 J1.8 R5.1 | length 8.9
  Top Layer w0.11: J1.8 54.635,80.01 54.635,80.538 55.015,80.918 55.609,80.918 55.994,80.533 55.994,80.031 55.995,80.031 56.075,79.952 J1.5 56.075,79.585 55.944,79.454 55.944,77.306 57.25,76 57.25,75.336 57.315,75.271 R5.1
USB*_P: J1.6 J1.7 R6.1 | length 7.9
  Top Layer w0.11: J1.7 55.048,79.977 55.048,80.616 55.113,80.68 55.51,80.68 55.575,80.616 55.575,80.359 55.575,79.585 55.706,79.454 55.706,77.208 57.013,75.902 57.013,75.336 56.948,75.271 R6.1
USB_N: R5.2 U3.46 Z2.1 | length 31.5
  Top Layer w0.11: U3.46 53.15,44.971 53.069,45.052 53.069,57.733 57.185,61.849 57.185,69.75 57.185,73.435 57.25,73.5 57.771,73.5 R5.2
USB_P: R6.2 U3.47 Z1.1 | length 31.6
  Top Layer w0.11: U3.47 52.75,44.971 52.831,45.052 52.831,57.831 56.948,61.948 56.948,69.75 56.948,73.43 56.883,73.495 R6.2@56.213,73.495 ; R6.2@56.086,73.893 R6.2@56.299,73.68
USBBOOT: C33.2 D1.3 S1.3 S1.4 U3.6 | length 29.3
  Top Layer w0.152: D1.3 37,39.5 39.316,41.816 40.878,41.917 cw(c40.925,41.189) 40.939,41.919 44.314,41.861 44.325,41.85 U3.6
  Top Layer w0.254: C33.2 C33.2@35.201,31.984 ; D1.3 36.25,36.45 34.883,35.083 34.883,32.302 C33.2@35.201,31.984 ; S1.4 37.041,31 36.668,31.373 36.668,31.732 36.416,31.984 C33.2@35.201,31.984 ; S1.4@37.625,31.05 S1.3@42.882,31.05
V_BAT: Q1.3 Q2.3 SH4.1 SH7.1 U1.3 | length 67.4
  Top Layer w0.635: Q2.3 59.75,63 62.5,65.75 69.25,65.75 Q1.3 69.375,59.931 69.375,50.011 ; U1.3 69.375,50.011 ; SH4.1 SH7.1 89.582,55.948 89.539,55.871 89.359,55.692 69.375,50.011
V_BAT_IN: C2.2 J2.1 Q1.2 | length 10.9
  Top Layer w0.635: C2.2 76.037,60.295 75.768,60.564 75.768,60.566 74.45,61.884 Q1.2 77.75,65.194 77.75,67 J2.1
V_USB: C1.2 D2.A D3.1 J1.2 J1.11 Q2.1 R10.2 U1.4 | length 61.1
  Top Layer w0.203: v1(53,75.75) v1@53.013,75.763
  Top Layer w0.254: J1.11 53.013,79.912 v1@53.013,75.925 ; J1.2 57.753,79.872 57.753,77.196 v1(57.828,77.121) ; D3.1@58.725,57.075 D3.1@58.8,57.075 ; Q2.1@58.8,58.65 D3.1@58.8,57.075 ; Q2.1@58.8,58.85 Q2.1 ; R10.2@60.5,56.767 60.415,56.767 60.107,57.075 D3.1@58.8,57.075
  Top Layer w0.305: Q2.1@58.8,58.65 Q2.1@58.8,58.85 ; Q2.1 58.8,60.075 ; v1(61.25,76.375) C1.2 62.101,75.259 62.25,75.11 62.25,67.5 58.8,64.05 58.8,60.075 ; D2.A 66.093,42.049 65.774,41.729 65.521,41.729 62.5,44.75 62.5,47 67.766,50.59 ccw(c67.595,50.843) 67.859,50.994 ; 67.859,50.995 67.731,51.216 U1.4 67.416,51.722 66.638,52.5 64.75,52.5 62.669,54.581 62.669,60.006 62.427,60.248 58.973,60.248 58.8,60.075
XIN: C18.2 U3.20 Y1.1 | length 9.9
  Top Layer w0.152: C18.2 47.584,31.2 50.085,31.2 50.174,31.289 50.174,33.424 51.15,34.4 U3.20
XOUT: R13.1 U3.21 | length 5.9
  Top Layer w0.152: U3.21 51.55,34.513 51.55,34.45 51.965,34.003 ccw(c52.5,34.5) 52.004,33.964 52.432,33.568 52.521,33.479 52.521,32.75 R13.1 ; R13.1@52.915,32.5 R13.1@53,32.5
pads on no net: D1.2 D3.2 D15.3 J1. J1.4 J1.10 J1.S1 J1.S2 J1.S3 J1.S4 J1.S5 J1.S6 J2.S1 J2.S2 J3.3 J3.6 J3.8 S3.1 S3.P$1 S3.P$2 U2.4 U3.7 U3.17 U3.18 U3.28 U3.29 U3.30 U3.31 U3.32 U3.34 U3.35 U3.36 U3.37

## Polygon pours and split planes (outlines as drawn)
GND on Layer 1 "GND_L02_P003" (solid, pour order 3): 52.25,77 52,76.75 49.25,76.75 49.5,63 61.45,63 61.775,76.75 59,76.75 58.75,77 58.75,78.5 52.25,78.5
GND on Layer 1 "GND_L02_P000" (solid, remove dead copper, pour order 0): 41.769,64.61 49.677,66.452 57.843,65.402 65.118,61.177 67.519,59.36 71.519,54.36 75.019,47.61 75.519,40.61 75.519,36.97 74.019,31.672 71.519,27.61 69.069,23.628 62.149,17.924 54.782,15.52 47.762,15.223 40.65,17.275 34.178,21.497 28.327,27.348 26.233,32.293 25.019,42.61 26.269,48.86 27.999,54.09 36.519,62.61
V_USB on Layer 2 "V_USB_L03_P002" (solid, pour order 2): 52.25,77.25 52,77 49.25,77 49.395,69 61.975,69 61.975,77 59,77 58.75,77.25 58.75,78.75 52.25,78.75
3V3 on Layer 2 "3V3_L03_P001" (solid, remove dead copper, pour order 1): 41.546,64.329 49.454,66.171 57.621,65.121 64.895,60.896 67.296,59.079 71.296,54.079 74.796,47.329 75.296,40.329 75.296,36.689 73.796,31.391 71.296,27.329 69.296,24.079 63.823,19.082 51.796,15.329 48.796,15.329 39.796,17.579 33.668,21.95 27.776,27.841 26.01,32.012 24.796,42.329 26.046,48.579 27.776,53.809 36.296,62.329

## Silkscreen, mask and mechanical layers (free items; w line width, h text height)
Top Overlay:
  circle w1.2: c50.075,40.8 r25
  region: 223.959,46.307 223.959,46.76 224.185,46.76 224.185,46.307
  lines w1.5: 12,21 ccw(c22.943,18.828) 28.175,8.975 ; 12,21.25 cw(c32.949,12.541) 25.3,33.9 ; 14.725,25.825 cw(c14.65,36.45) 4.025,36.375 cw(c14.366,36.159) 17.7,45.95 ; 23.749,65.814 ccw(c17.923,57.83) 13.15,49.175 ccw(c23.746,61.231) 24.643,45.205 ; 23.75,78 ccw(c38.445,71.493) 31.036,57.232 ; 24.25,78.5 cw(c32.969,72.247) 32.751,82.974 ; 32.992,82.979 cw(c32.062,66.887) 48.175,66.45 ; 34.15,21.125 ccw(c58.851,2.715) 28.55,8.275 ccw(c41.433,8.453) 38.125,-4 ccw(c38.268,9.828) 50.75,3.875 cw(c85.369,16.427) 48.55,15.8 ; 44.336,77.562 cw(c57.187,72.705) 56.1,86.4 cw(c51.896,72.804) 66,74.7 ; 50.9,3.675 ccw(c61.516,8.066) 72.75,10.475 ; 62.6,62.275 ccw(c45.136,73.731) 66,74.7 ; 64.925,20.95 cw(c50.732,2.003) 73.475,8.575 ccw(c77.162,17.498) 86.1,21.15 ; 72.975,29.875 cw(c71.061,12.761) 86.1,21.15 ; 73.225,52.025 ccw(c67.288,67.787) 83.05,73.725 ccw(c77.123,69.184) 81.025,75.55 ; 75.05,40.375 cw(c80.238,27.698) 90.981,36.195 ; 81.25,75.363 ccw(c73.988,66.688) 66,74.7 ; 81.416,58.462 cw(c85.925,48.025) 96.45,52.325 ; 89.925,38.275 ccw(c86.62,48.334) 96.3,52.625 ; 90.6,36.65 cw(c82.792,26.781) 94.575,31.2 cw(c86.847,29.118) 86.1,21.15
  lines w2: 13.018,35.199 ccw(c-22.802,136.454) 21.25,38.5 ; 17.387,56.733 ccw(c37.574,90.997) 23.737,53.714 ; 21.649,16.43 ccw(c-178.021,239.059) 27.87,22.17 ; 32.75,72.75 ccw(c306.13,208.048) 35.792,66.769 ; 39,6.25 cw(c105.214,-0.835) 40.189,13.525 ; 60.5,13.5 cw(c13.623,0.971) 61.769,7 ; 69.036,62.476 cw(c112.012,34.417) 70.778,64.979 ; 72.5,21.75 ccw(c102.049,54.852) 76.819,18.35 ; 78,32.5 cw(c75.158,-0.278) 84.643,31.226 ; 78.5,47.75 cw(c86.266,20.303) 84.533,48.775
  text "SCL" at 32.879,76.404 h1.52
  text "SDA" at 25.129,72.979 h1.52
  text "3V3" at 40.979,72.079 h1.52
  text "GND" at 27.379,67.604 h1.52
  text "D5" at 10.654,60.579 h1.52
  text "D4" at 10.504,57.754 h1.52
  text "VBAT" at 81.254,55.254 h1.52
  text "VBAT" at 86.754,44.754 h1.52
  text "D3" at 7.254,36.754 h1.52
  text "3V3" at 85.004,35.254 h1.52
  text "D2" at 8.004,31.004 h1.52
  text "3V3" at 83.004,26.254 h1.52
  text "RESET" at 56.804,24.929 h1.52
  text "BOOT" at 37.079,24.854 h1.52
  text "GND" at 80.858,22.781 h1.52 r320
  text "OFF" at 46.204,22.004 h0.8
  text "ON" at 53.879,22.004 h0.8
  text "POWER" at 47.254,18.754 h1.52
  text "D1" at 14.254,16.004 h1.52
  text "GND" at 74.004,13.504 h1.52
  text "D0" at 19.004,10.754 h1.52
  text "A3" at 33.004,3.004 h1.52
  text "A0" at 65.004,2.754 h1.52
  text "A2" at 40.754,1.254 h1.52
  text "A1" at 59.004,1.254 h1.52
BoardOutline:
  lines w1: 11.952,21.289 ccw(c22.894,19.117) 28.127,9.264 ; 11.952,21.539 cw(c32.901,12.83) 14.495,26.095 ; 14.677,26.114 cw(c14.602,36.739) 3.977,36.664 cw(c14.318,36.448) 17.652,46.239 ; 17.785,46.598 cw(c23.698,61.521) 13.102,49.464 cw(c17.875,58.119) 23.249,66.414 ; 23.391,66.028 cw(c38.396,71.783) 23.702,78.289 ; 24.202,78.789 cw(c32.92,72.536) 32.702,83.263 ; 28.683,9.477 ccw(c58.802,3.005) 28.502,8.564 ccw(c41.385,8.742) 38.077,-3.711 ccw(c38.22,10.117) 50.702,4.164 ; 32.943,83.268 cw(c32.014,67.177) 43.72,78.257 ; 44.288,77.851 cw(c57.138,72.995) 56.052,86.689 cw(c51.847,73.093) 65.952,74.989 cw(c73.94,66.977) 81.202,75.653 ; 50.852,3.964 ccw(c61.468,8.356) 72.955,8.577 ; 73.427,8.864 ccw(c77.114,17.787) 86.052,21.439 ccw(c86.799,29.407) 94.527,31.489 ccw(c82.744,27.07) 89.446,37.721 ; 80.977,75.839 cw(c77.075,69.474) 83.002,74.014 cw(c67.239,68.077) 81.35,58.88 ; 81.368,58.752 cw(c85.877,48.314) 96.402,52.614 ; 89.668,38.498 ccw(c86.571,48.624) 96.252,52.914

## Text inside footprints (layer, text, board x,y; h text height)
J1: Mechanical 13 "PCB EDGE" at 49.825,85.8 h0.61 r180
U3: Mechanical 13 "*" at 48.435,43.415 h1.27